# Altium PCB TAUV-Interfacer.PcbDoc (part 1 of 2)
Units mil, origin at the board's own origin, x right, y up, seen from the top; angles counter-clockwise.
Board outline 4460 x 2770 mil, 4 copper layers (Component Side, Ground Plane, Power Plane, Solder Side), stack 33.234 mil thick; 196 components, 135 nets, 730 pads, 0 vias.
Unrouted connection lines stored in the file: 437.
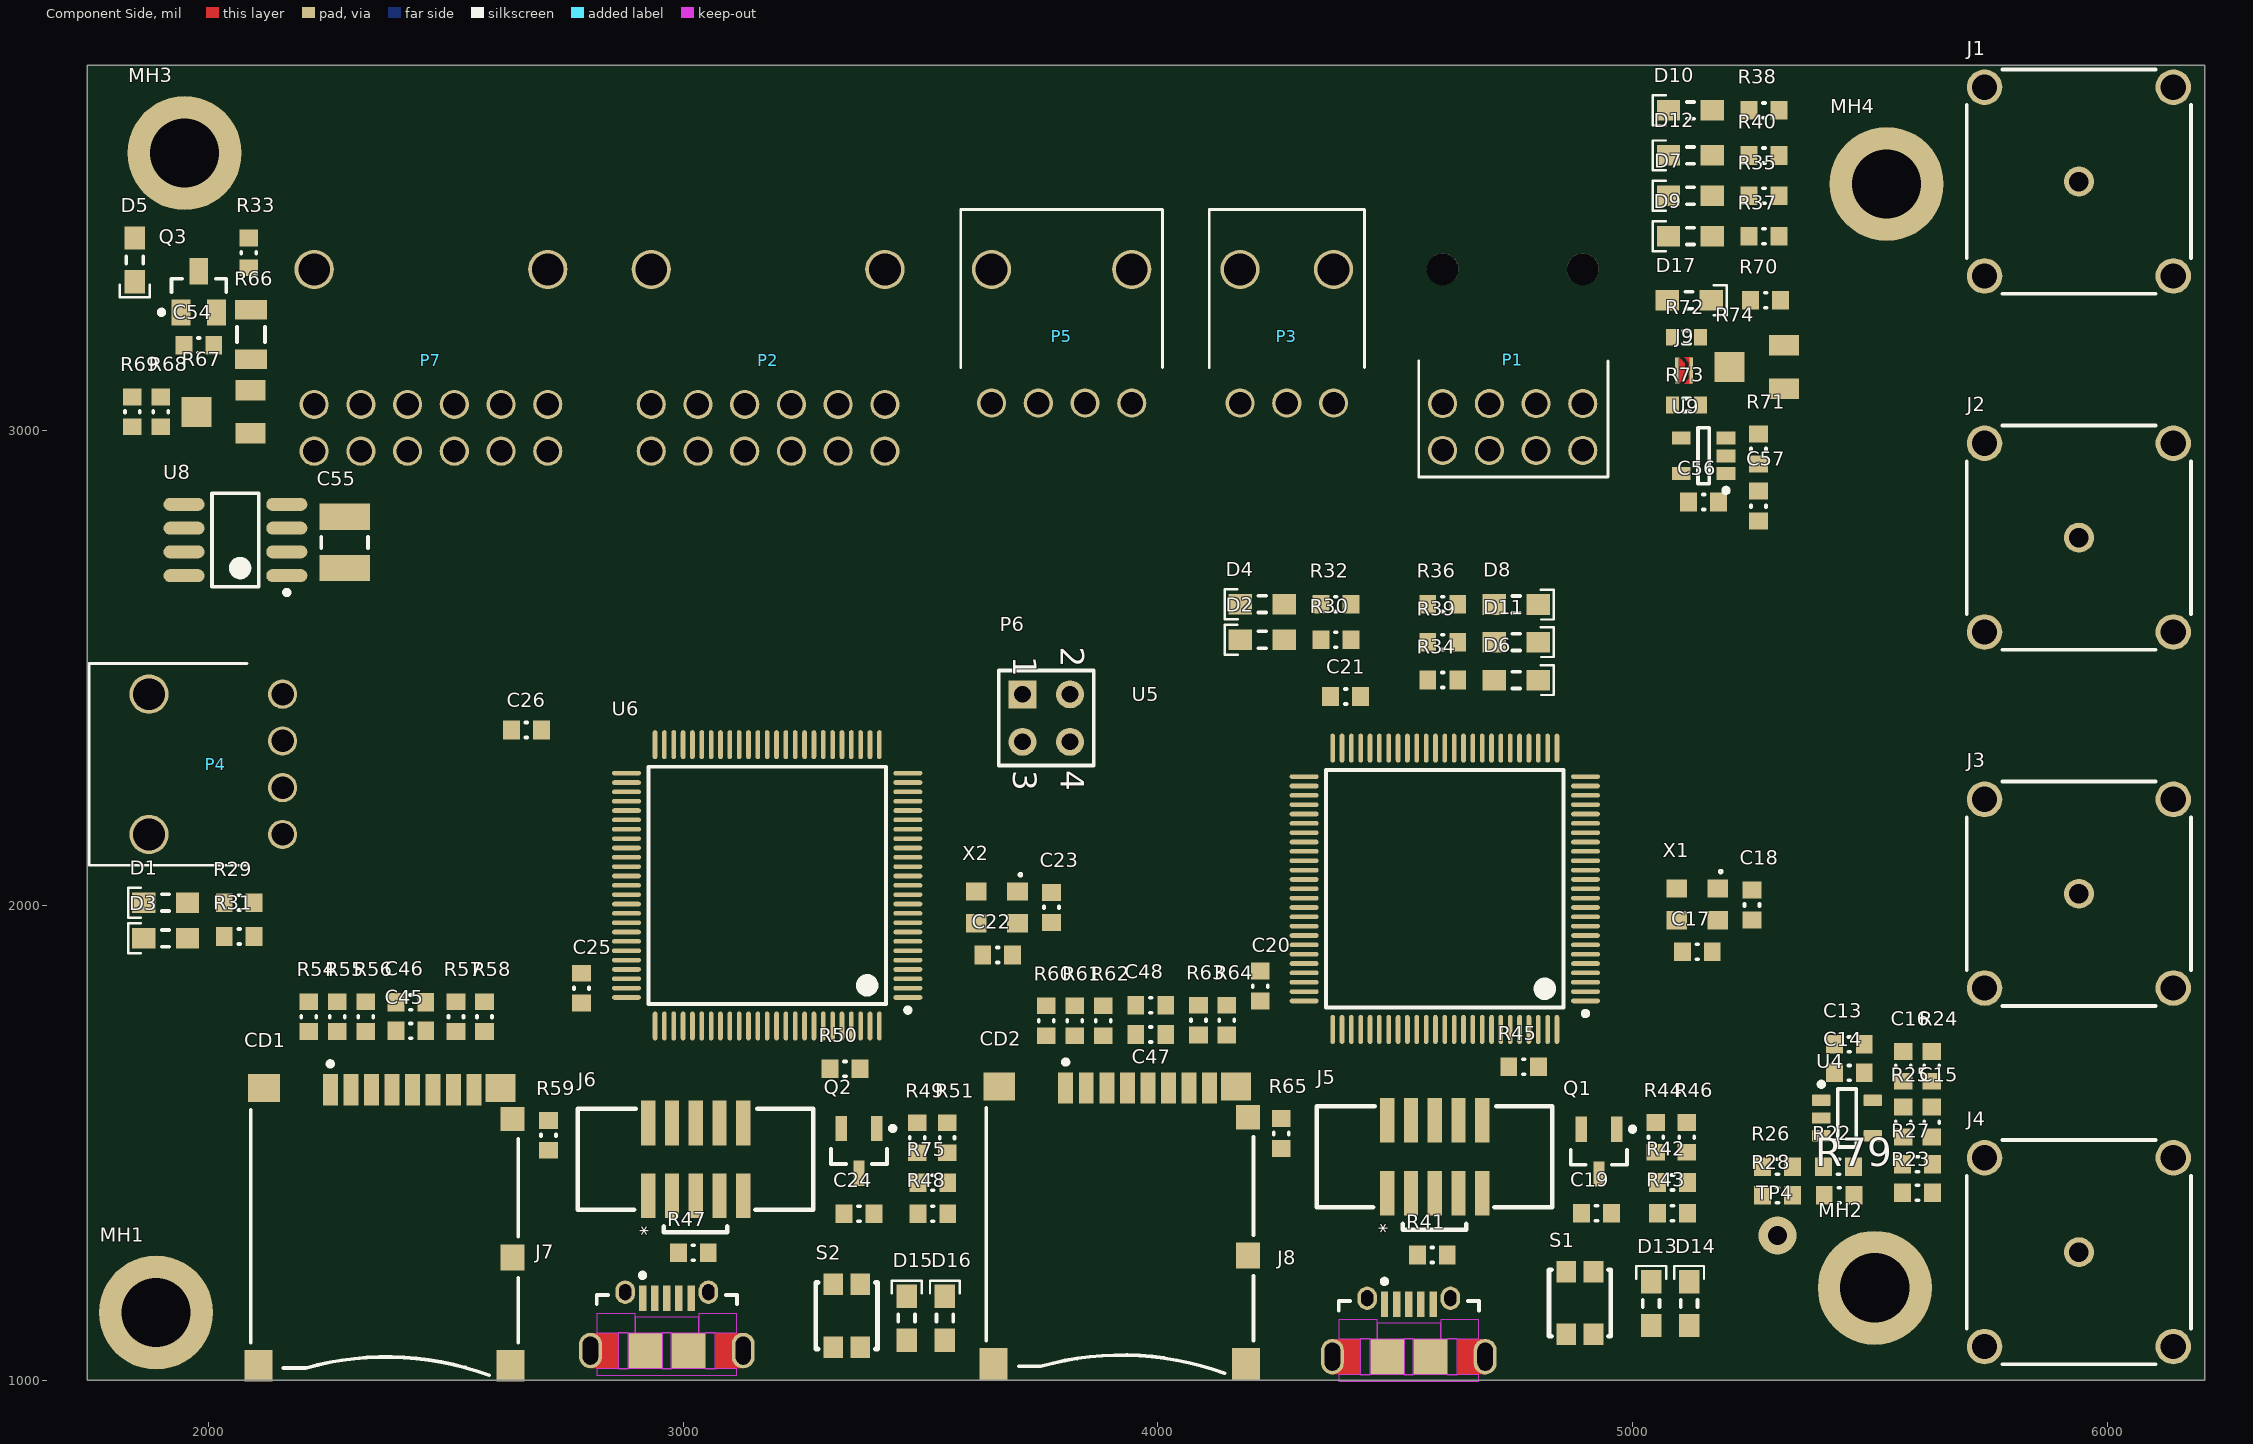
[diagram p0: Component Side view]
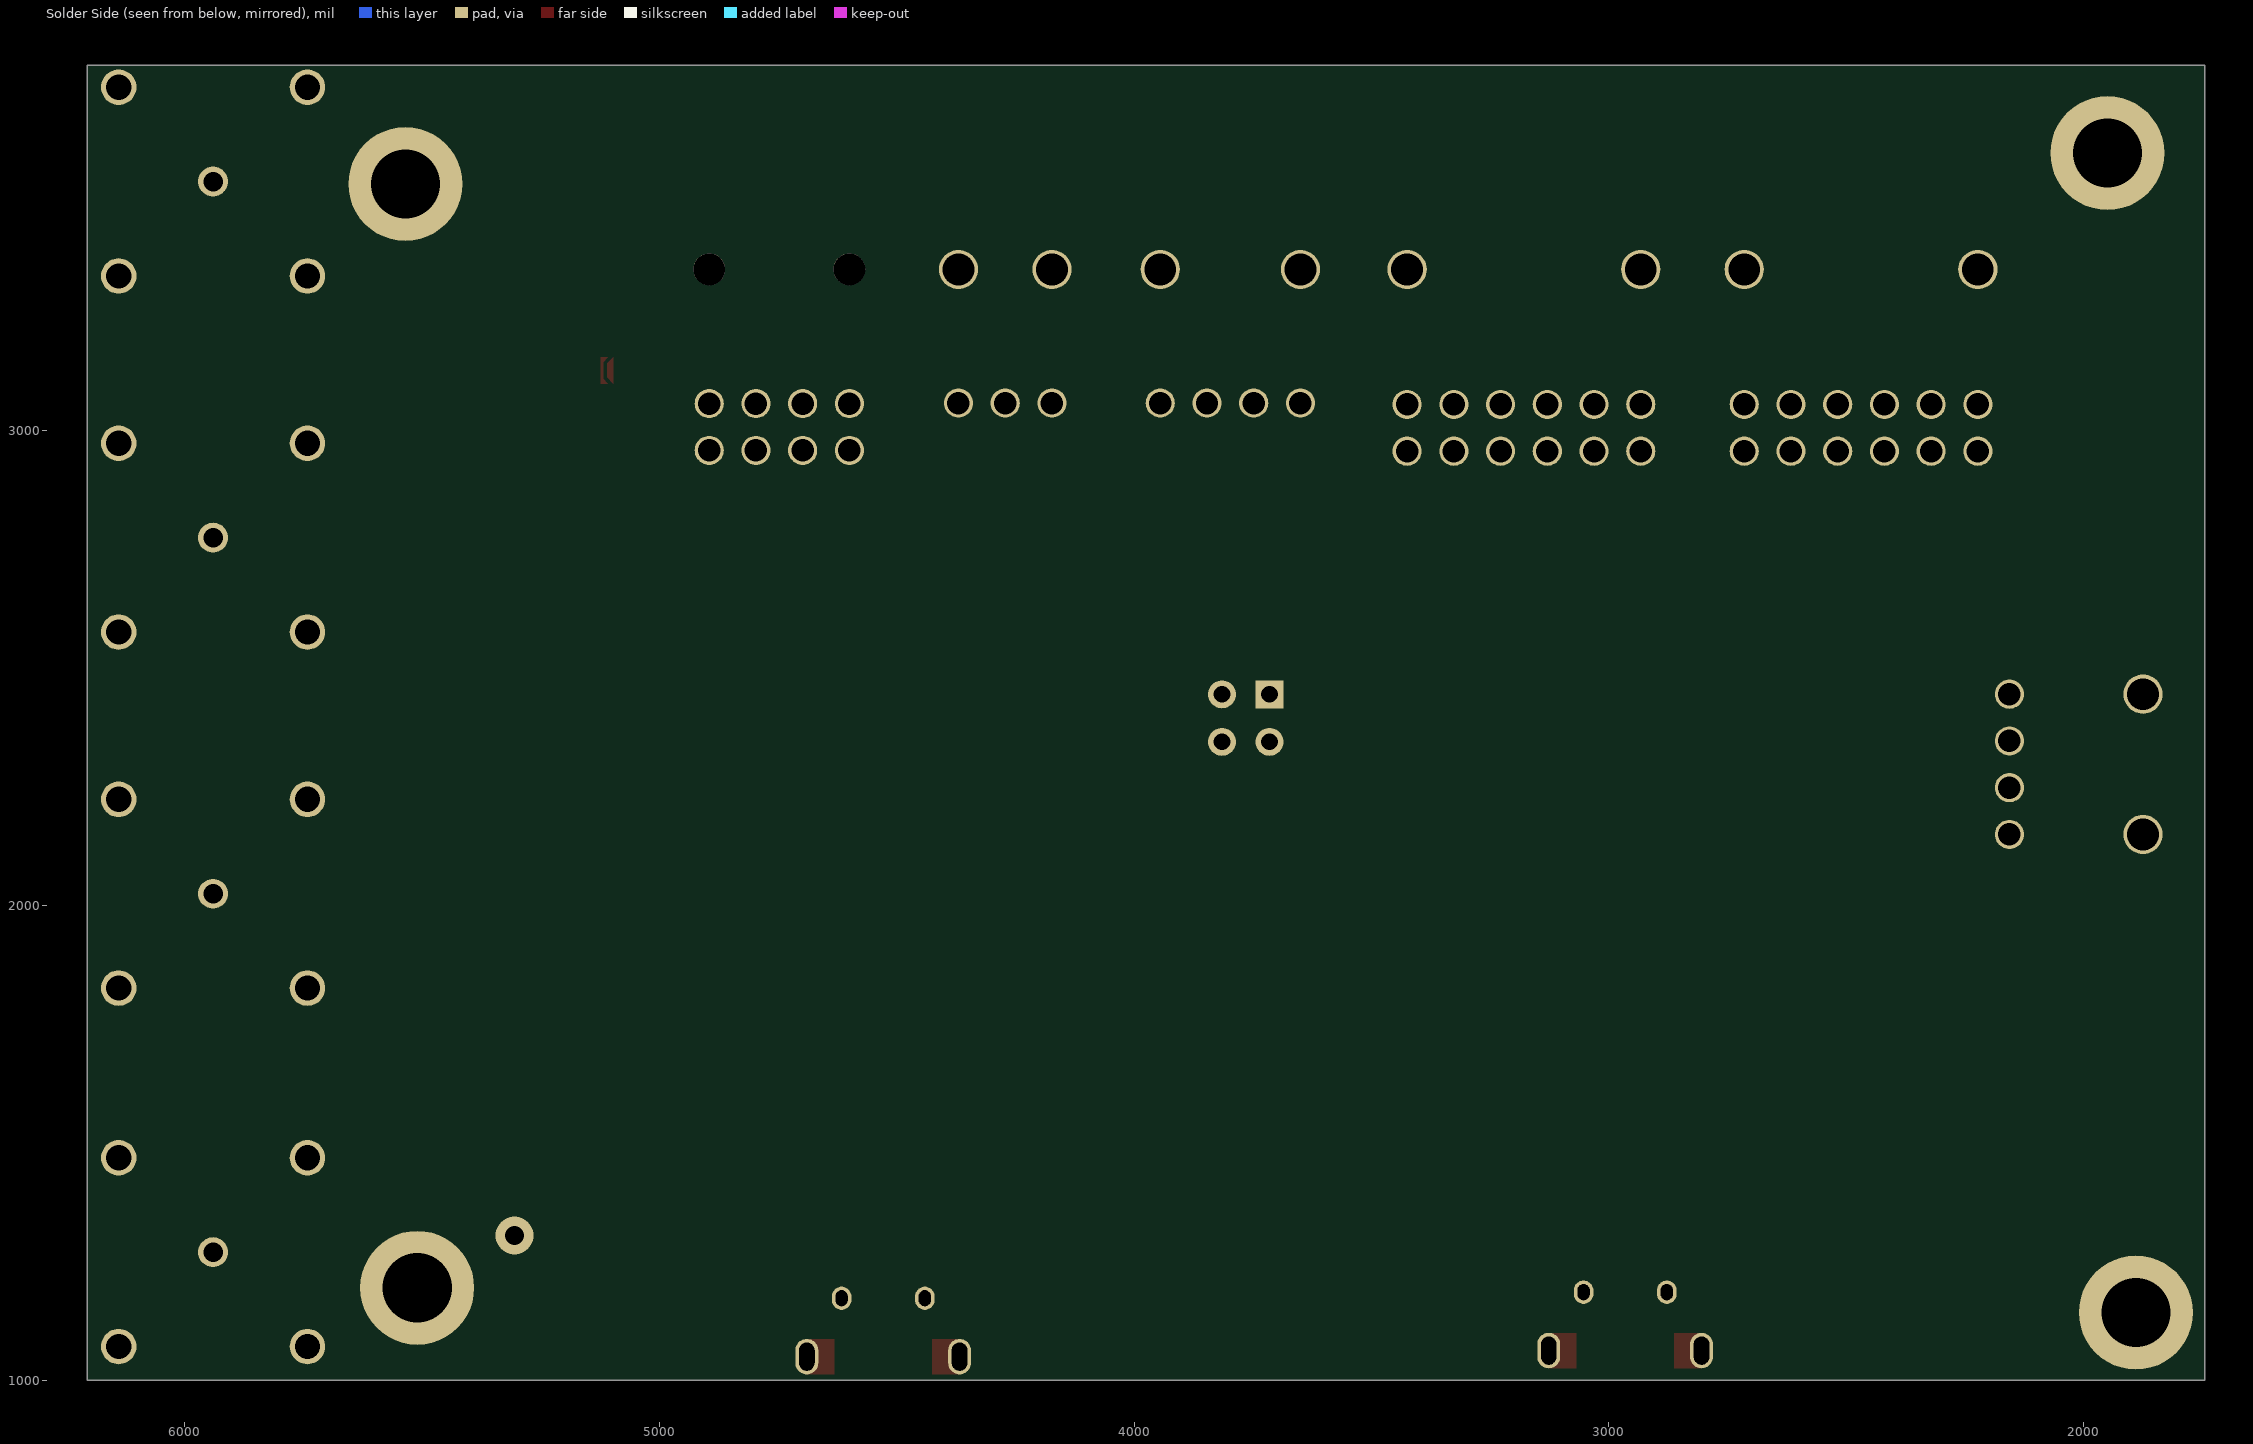
[diagram p1: Solder Side view, seen from below]
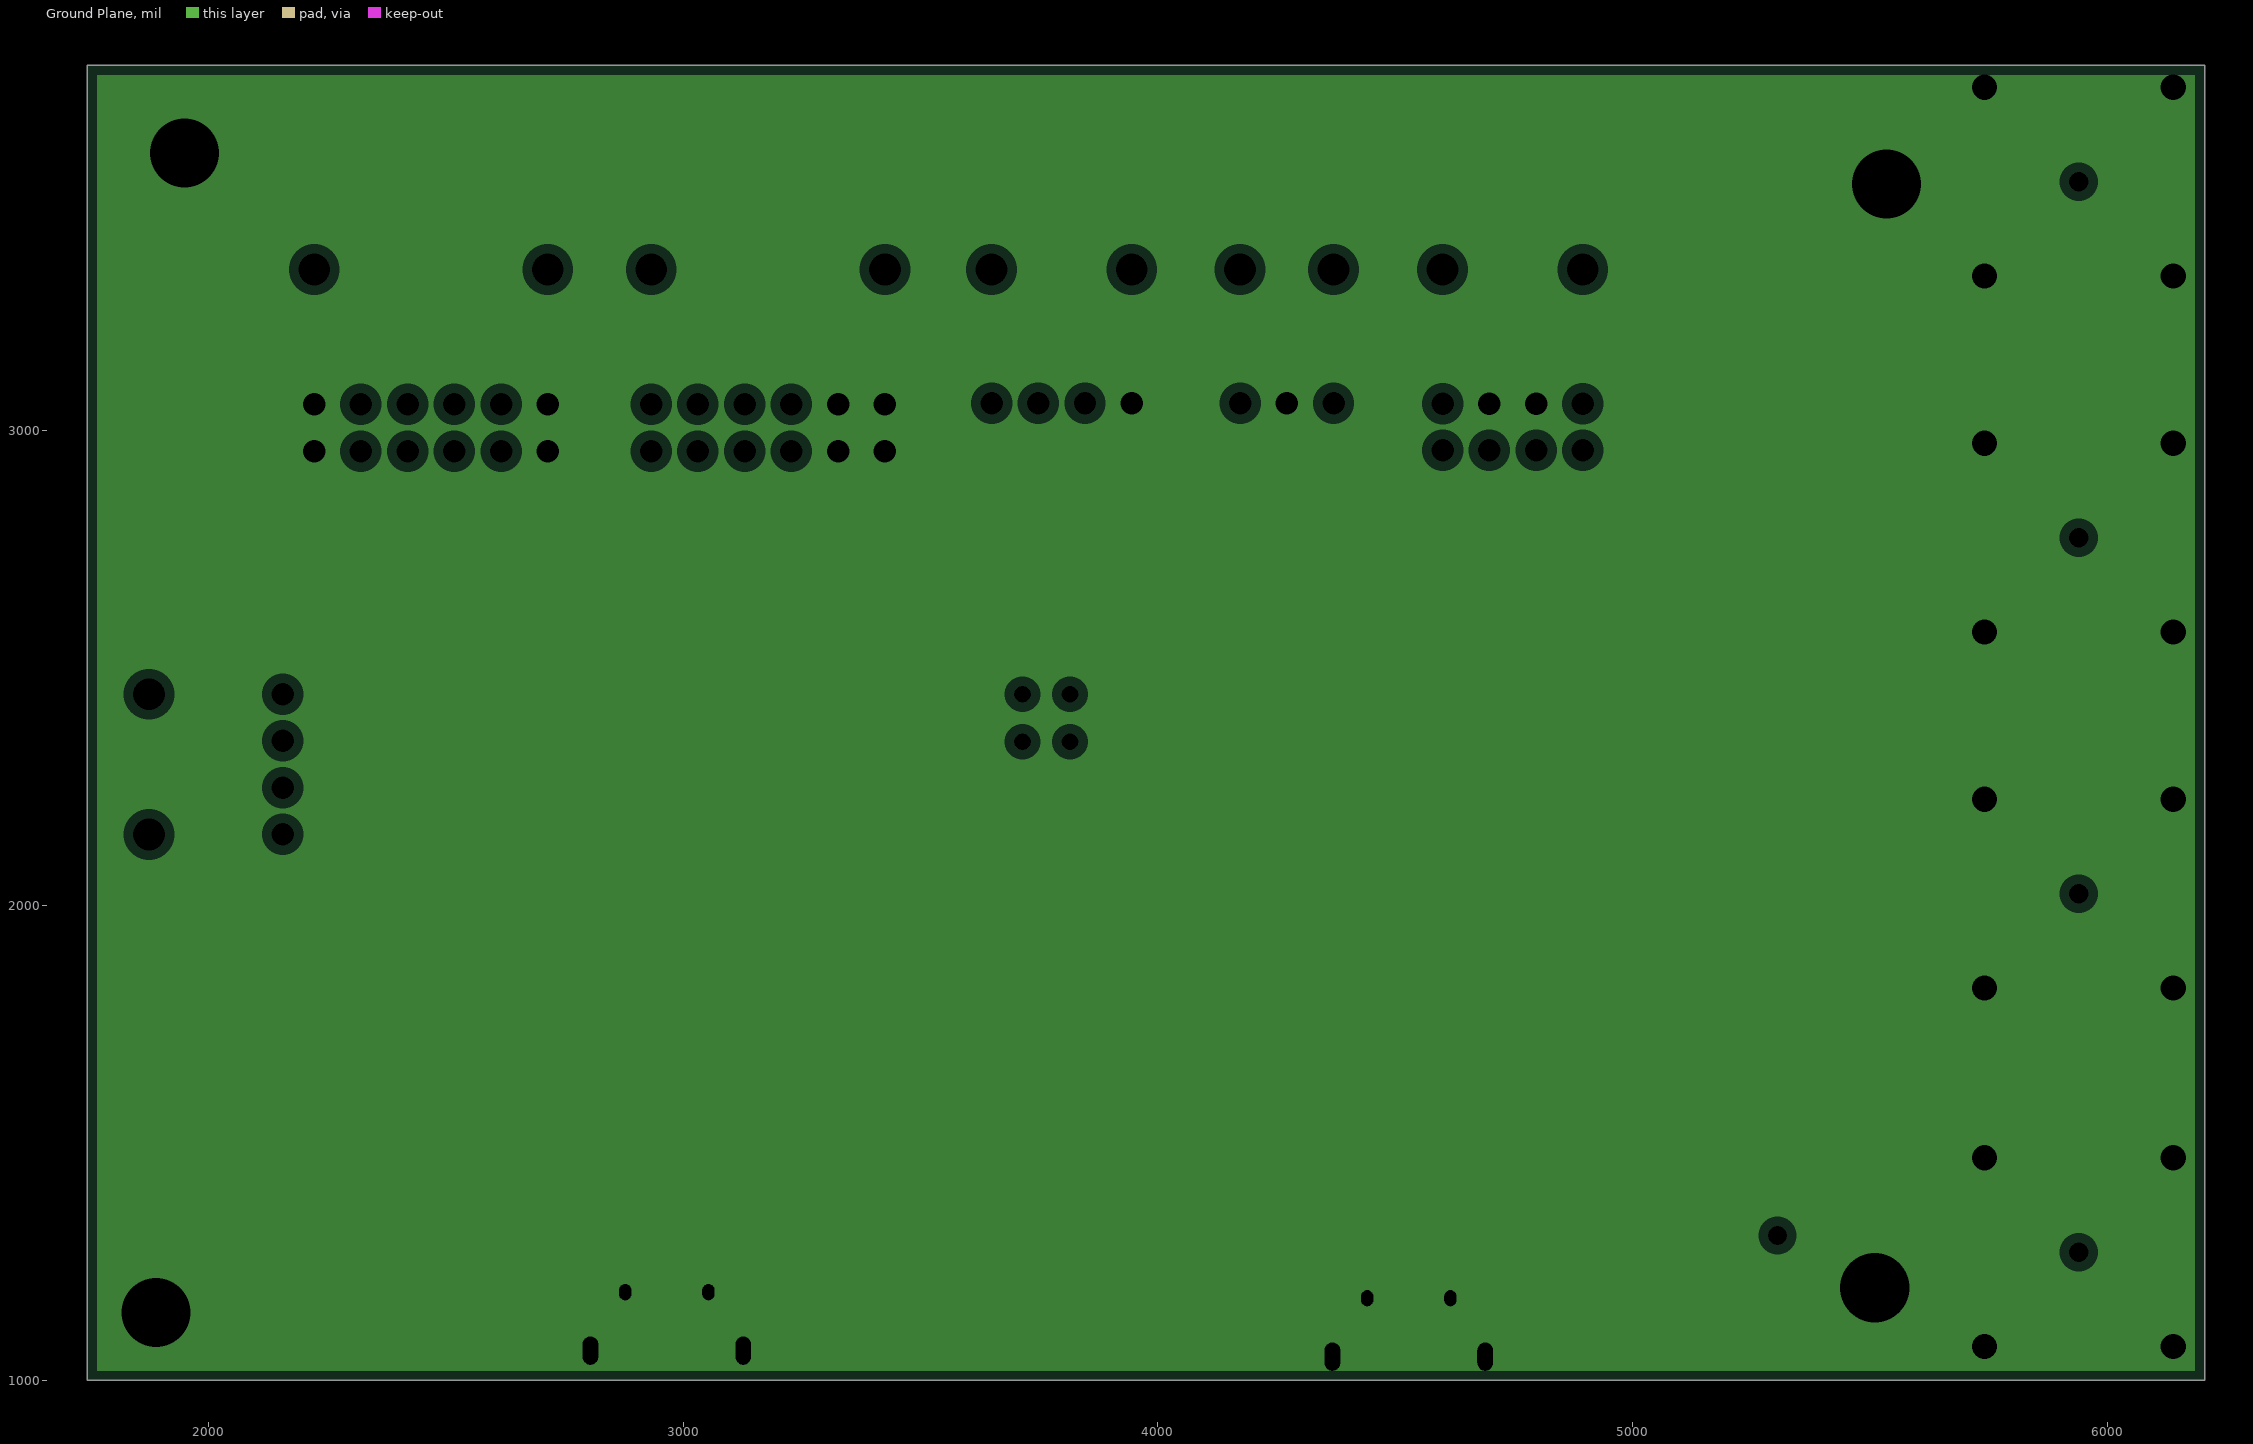
[diagram p2: Ground Plane, clearances drawn from the general rule]
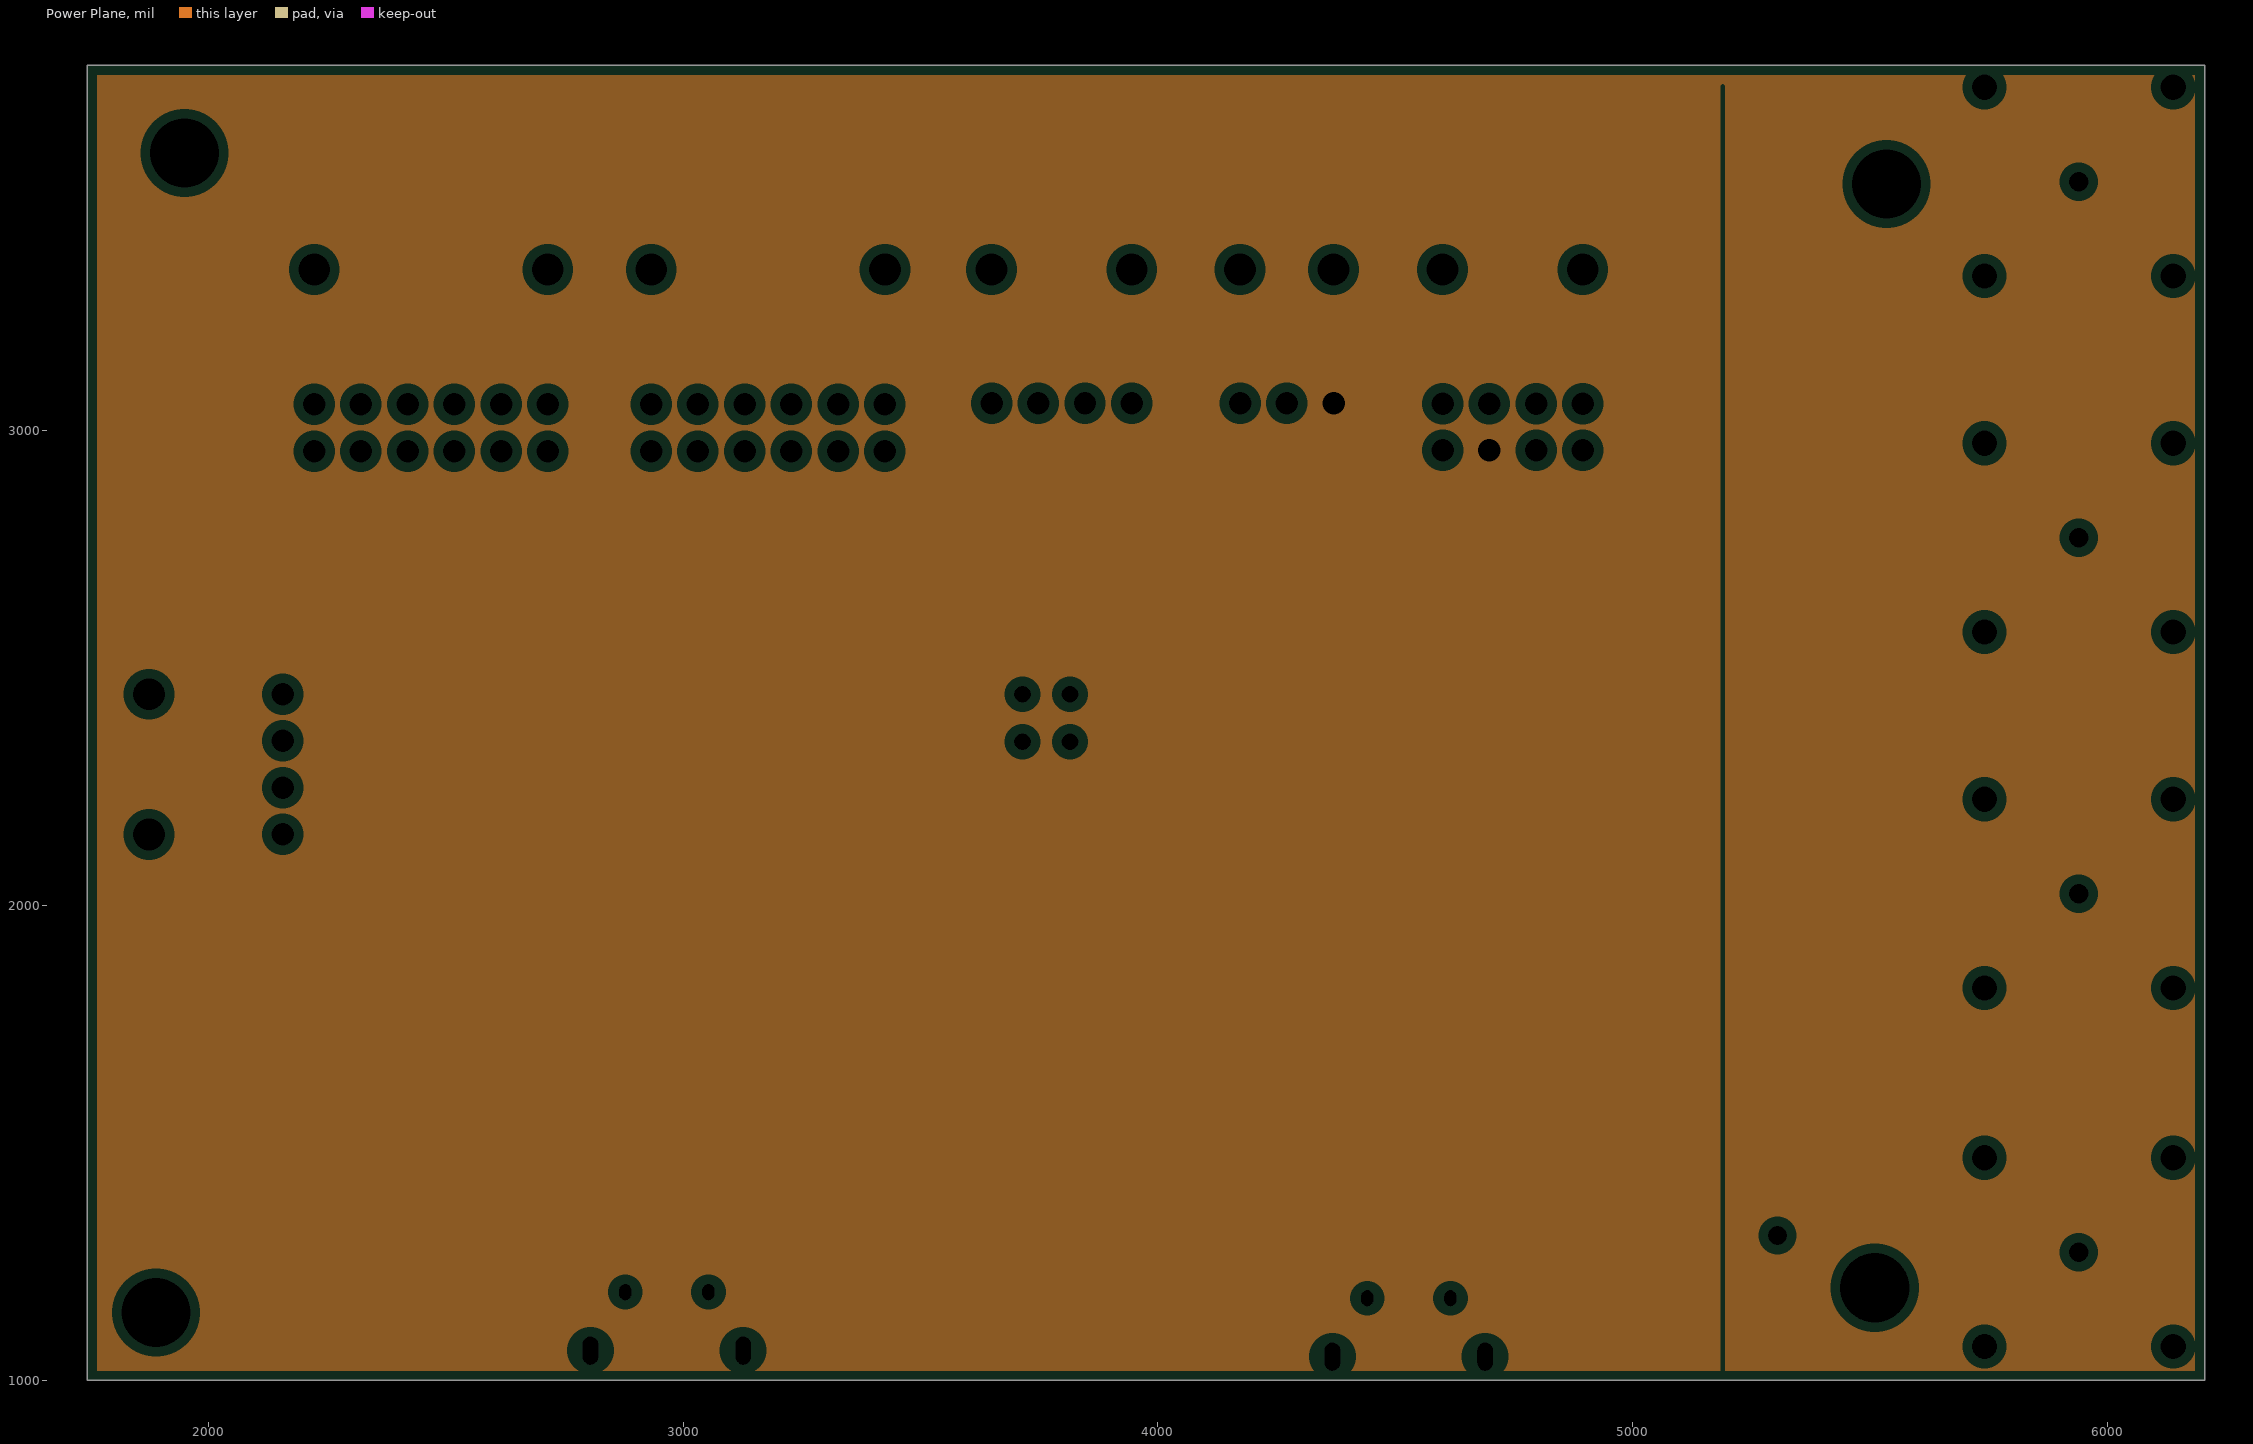
[diagram p3: Power Plane, clearances drawn from the general rule]

## Layer stack, top to bottom
Top Solder: solder mask 0.4, Solder Resist, Dk 3.5
Component Side: signal copper 1.4
Dielectric 1: core 12.6, FR-4, Dk 4.8
Ground Plane: plane copper 1.417, net GND
Dielectric 3: prepreg 5, Dk 4.2
Power Plane: plane copper 1.417, net VCC_3V3
Dielectric 4: core 10, Dk 4.2
Solder Side: signal copper 1.4
Bottom Solder: solder mask 0.4, Solder Resist, Dk 3.5

## Board outline
1745,1000 6205,1000 6205,3770 1745,3770

## Design rules (kind name [scope] priority, off if disabled: settings)
Clearance [All] p1: gap=8 ignorepadtopadclearanceinfootprint=FALSE
PlaneClearance [All] p1: clearance=20
PlaneConnect [All] p1: planeconnectstyle=Relief reliefexpansion=20 reliefentries=4 reliefconductorwidth=10 reliefairgap=10
PolygonConnect [All] p1: connectstyle=Relief reliefconductorwidth=10 reliefentries=4 polygonreliefangle="90 Angle" airgapwidth=10
RoomDefinition U_Power [InComponentClass('U_Power')] p1: confinementstyle=ConfineIn formatcopy=TRUE lockcomponents=FALSE outline 7720,5236.5 9300,5236.5 9300,5566.5 7720,5566.5
RoomDefinition U_MCU_Powers [InComponentClass('U_MCU_Powers')] p2: confinementstyle=ConfineIn formatcopy=TRUE lockcomponents=FALSE outline 7045,5770 11570,5770 11570,6010 7045,6010
RoutingVias [All] p1: holewidth=28 width=50 viastyle="Through Hole" minholewidth=28 minwidth=50 maxholewidth=28 maxwidth=50
SolderMaskExpansion [All] p1: expansion=4
Width [All] p1: maxlimit=10 minlimit=8 preferedwidth=10 minimp=50.000000 maximp=50.000000 favimp=50.000000
28 further rules are at their usual default settings.

## Classes and differential pairs
net class JTAG: MCU1_NRST MCU1_TCK MCU1_TDI MCU1_TDO MCU1_TMS MCU2_NRST MCU2_TCK MCU2_TDI MCU2_TDO MCU2_TMS
component class U_USB: J7 J8
component class U_Servos: C54 C55 P7 Q3 R66 R67 R68 R69 U8
component class U_SD: C45 C46 C47 C48 CD1 CD2 R54 R55 R56 R57 R58 R59 R60 R61 R62 R63 R64 R65
component class U_Power: C49 C50 C51 C52 C53 FB1 U7
component class U_MCU_Powers: C27 C28 C29 C30 C31 C32 C33 C34 C35 C36 C37 C38 C39 C40 C41 C42 C43 C44 R52 R53
component class U_MCU_Main: C22 C23 C24 C25 C26 D15 D16 J6 P6 Q2 R47 R48 R49 R50 R51 R75 S2 U6 X2
component class U_MCU_Hydro: C17 C18 C19 C20 C21 D13 D14 J5 Q1 R41 R42 R43 R44 R45 R46 S1 U5 X1
component class U_Interface: D1 D2 D3 D4 D5 D6 D7 D8 D9 D10 D11 D12 MH1 MH2 MH3 MH4 P1 P2 P3 P4 P5 R29 R30 R31 R32 R33 R34 R35 R36 R37 R38 R39 R40
component class U_Hydrophones: C1 C2 C3 C4 C5 C6 C7 C8 C9 C10 C11 C12 C13 C14 C15 C16 J1 J2 J3 J4 R1 R2 R3 R4 R5 R6 R7 R8 R9 R10 R11 R12 R13 R14 R15 R16 R17 R18 R19 R20 R21 R22 R23 R24 R25 R26 R27 R28 R76 R77 R78 R79 TP1 TP2 TP3 TP4 U1 U2 U3 U4
component class U_Hall_Effect: C56 C57 D17 J9 R70 R71 R72 R73 R74 U9

## Components (designator, comment, footprint, x,y, rotation, side; value= is the part's Value field where it differs from the comment)
C1 "1uF" CAPC0603(1608)100_N 19250,2485 r0 top
C2 "100nF" CAPC0603(1608)100_N 19420,2485 r0 top
C3 "10nF" CAPC0603(1608)100_N 18905,2485 r0 top
C4 "10nF" CAPC0603(1608)100_N 17275,2485 r0 top
C5 "1uF" CAPC0603(1608)100_N 16405,2485 r0 top
C6 "100nF" CAPC0603(1608)100_N 16575,2485 r0 top
C7 "10nF" CAPC0603(1608)100_N 16065,2485 r0 top
C8 "10nF" CAPC0603(1608)100_N 14270,2485 r0 top
C9 "1uF" CAPC0603(1608)100_N 13250,2485 r0 top
C10 "100nF" CAPC0603(1608)100_N 13390,2455 r90 top
C11 "10nF" CAPC0603(1608)100_N 12830,2485 r0 top
C12 "10nF" CAPC0603(1608)100_N 10925,2455 r90 top
C13 "1uF" CAPC0603(1608)100_N 5456.5,1707.72 r0 top
C14 "100nF" CAPC0603(1608)100_N 5456.5,1647.72 r180 top
C15 "10nF" CAPC0603(1608)100_N 5630,1543.98 r270 top
C16 "10nF" CAPC0603(1608)100_N 5570,1661.5 r270 top
C17 "10pF" CAPC0603(1608)100_N 5136.22,1902.66 r180 top
C18 "10pF" CAPC0603(1608)100_N 5251.22,2001.16 r90 top
C19 "100nF" CAPC0603(1608)100_N 4923.94,1351.85 r0 top
C20 "CAP 2.2uF" CAPC0603(1608)100_N 4215.43,1830.49 r90 top value=2.2uF
C21 "CAP 2.2uF" CAPC0603(1608)100_N 4395.43,2440.49 r0 top value=2.2uF
C22 "10pF" CAPC0603(1608)100_N 3662.56,1896.12 r180 top
C23 "10pF" CAPC0603(1608)100_N 3776.06,1996.12 r90 top
C24 "100nF" CAPC0603(1608)100_N 3370.55,1351.12 r0 top
C25 "CAP 2.2uF" CAPC0603(1608)100_N 2786.06,1826.16 r90 top value=2.2uF
C26 "CAP 2.2uF" CAPC0603(1608)100_N 2670,2370 r0 top value=2.2uF
C27 "100nF" CAPC0603(1608)100_N 8905,5840 r90 top
C28 "100nF" CAPC0603(1608)100_N 9135,5840 r90 top
C29 "100nF" CAPC0603(1608)100_N 9365,5840 r90 top
C30 "100nF" CAPC0603(1608)100_N 9595,5840 r90 top
C31 "100nF" CAPC0603(1608)100_N 9855,5870 r0 top
C32 "100nF" CAPC0603(1608)100_N 10035,5840 r90 top
C33 "100nF" CAPC0603(1608)100_N 10265,5840 r90 top
C34 "100nF" CAPC0603(1608)100_N 10495,5840 r90 top
C35 "100nF" CAPC0603(1608)100_N 10725,5840 r90 top
C36 "100nF" CAPC0603(1608)100_N 10955,5840 r90 top
C37 "100nF" CAPC0603(1608)100_N 11185,5840 r90 top
C38 "100nF" CAPC0603(1608)100_N 11415,5840 r90 top
C39 "10uF" CAPC0603(1608)100_N 7545,5840 r90 top
C40 "100nF" CAPC0603(1608)100_N 7775,5840 r90 top
C41 "1uF" CAPC0603(1608)100_N 8035,5870 r0 top
C42 "10uF" CAPC0603(1608)100_N 8215,5840 r90 top
C43 "100nF" CAPC0603(1608)100_N 8445,5840 r90 top
C44 "1uF" CAPC0603(1608)100_N 8675,5840 r90 top
C45 "100nF" CAPC0603(1608)100_N 2426.58,1736.12 r180 top
C46 "10uF" CAPC0603(1608)100_N 2426.58,1796.12 r180 top
C47 "100nF" CAPC0603(1608)100_N 3985,1728.5 r180 top
C48 "10uF" CAPC0603(1608)100_N 3985,1790 r180 top
C49 "100nF" CAPC0603(1608)100_N 7995,5396.5 r90 top
C50 "1uF" CAPC0603(1608)100_N 8225,5396.5 r90 top
C51 "100nF" CAPC0603(1608)100_N 8485,5426.5 r0 top
C52 "1uF" CAPC0603(1608)100_N 8665,5396.5 r90 top
C53 "22uF" CAPC1210(3225)100_N 7820,5396.5 r0 top
C54 "10nF" CAPC0603(1608)100_N 1980,3180 r0 top
C55 "CAP 22uF 25V 1210(3225)" CAPC1210(3225)220_N 2287.07,2765 r270 top value=22uF
C56 "100nF" CAPC0603(1608)100_N 5149.37,2850 r0 top
C57 "1uF" CAPC0603(1608)100_N 5265,2841.5 r90 top
CD1 "502774-0891" MOLX-502774-0891_V 2371.06,1321.12 r0 top
CD2 "502774-0891" MOLX-502774-0891_V 3920,1325 r0 top
D1 "LED BLUE" LED_0805 1910,2006.24 r0 top
D2 "LED BLUE" LED_0805 4220,2560 r0 top
D3 "LED GREEN" LED_0805 1910,1931.12 r0 top
D4 "LED GREEN" LED_0805 4220,2635 r0 top
D5 "LED GREEN" LED_0805 1845,3360 r90 top
D6 "LED YELLOW" LED_0805 4755,2475 r180 top
D7 "LED GREEN" LED_0805 5121.7,3495.18 r0 top
D8 "LED YELLOW" LED_0805 4755,2634.15 r180 top
D9 "LED GREEN" LED_0805 5121.7,3410 r0 top
D10 "LED GREEN" LED_0805 5121.7,3675 r0 top
D11 "LED GREEN" LED_0805 4755,2555 r180 top
D12 "LED GREEN" LED_0805 5121.7,3580 r0 top
D13 "LED RED" LED_0805 5038.94,1161.85 r270 top
D14 "LED RED" LED_0805 5118.94,1161.85 r270 top
D15 "LED RED" LED_0805 3470.98,1131.12 r270 top
D16 "LED RED" LED_0805 3551.5,1131.12 r270 top
D17 "LED RED" LED_0805 5118.94,3275 r180 top
FB1 "BLM31PG601SN1L" MURA-BLM31-B-CHIP-2_V 9170,5351.5 r90 top
J1 "51K201-400A5" ROS-51K201-400A5_V 5940,3525 r270 top
J2 "51K201-400A5" ROS-51K201-400A5_V 5940,2775 r270 top
J3 "51K201-400A5" ROS-51K201-400A5_V 5940,2025 r270 top
J4 "51K201-400A5" ROS-51K201-400A5_V 5940,1270 r270 top
J5 "JTAG 10POS 1.27" "5x2 JTAG SMD" 4834.8,1301.73 r90 top
J6 "JTAG 10POS 1.27" "5x2 JTAG SMD" 3278.23,1296.32 r90 top
J7 "ZX62D-AB-5P8" HIRO-ZX62D-AB-5P8_V 2965.73,1124.29 r0 top
J8 "ZX62D-AB-5P8" HIRO-ZX62D-AB-5P8_V 4528.5,1111.52 r0 top
J9 "(Closed)" "Solder Jumper - Closed" 5123.38,3127.13 r180 top
MH1 "#4-40" "Mounting Hole #4-40" 1890,1142.78 r0 top
MH2 "#4-40" "Mounting Hole #4-40" 5510,1195 r0 top
MH3 "#4-40" "Mounting Hole #4-40" 1950,3585 r0 top
MH4 "#4-40" "Mounting Hole #4-40" 5535,3520 r0 top
P1 "8-Pin 4x2 Molex Nano-Fit" "MOLEX NANO-FIT 2x4" 4599.72,2958.9 r0 top
P2 "12-Pin Molex Nano-Fit" "MOLEX NANO-FIT 2X6 - Right Angle" 3523.43,3055.55 r180 top
P3 "3-Pin Molex Nano-Fit" "MOLEX NANO-FIT 1X3" 4370,3058.5 r180 top
P4 "4-Pin Molex Nano-Fit" "MOLEX NANO-FIT 1X4" 2156.5,2445.28 r270 top
P5 "4-Pin Molex Nano-Fit" "MOLEX NANO-FIT 1X4" 3945,3058.5 r180 top
P6 "Header 2X2" HDR2X2 3715,2445 r270 top
P7 "12-Pin Molex Nano-Fit" "MOLEX NANO-FIT 2X6 - Right Angle" 2813.43,3055.55 r180 top
Q1 "2N7002" INF-PG-SOT23_M 4928.94,1481.85 r270 top
Q2 "2N7002" INF-PG-SOT23_M 3370.55,1483.37 r270 top
Q3 "FDN337N" FAIR-SSOT3L-3_V 1980,3292.89 r90 top
R1 "2K" RESC0603(1608)_N 19590,2485 r0 top value="2000.00 Ohm"
R2 "3K24 1%" RESC0603(1608)_N 19075,2485 r0 top value="3240.00 Ohm"
R3 "270R" RESC0603(1608)_N 18015,2475 r0 top value="270.00 Ohm"
R4 "10K" RESC0603(1608)_N 18205,2485 r0 top value="10000.00 Ohm"
R5 "10K" RESC0603(1608)_N 17615,2485 r0 top value="10000.00 Ohm"
R6 "3K24 1%" RESC0603(1608)_N 17445,2485 r0 top value="3240.00 Ohm"
R7 "10K" RESC0603(1608)_N 16915,2485 r0 top value="10000.00 Ohm"
R8 "2K" RESC0603(1608)_N 16745,2485 r0 top value="2000.00 Ohm"
R9 "3K24 1%" RESC0603(1608)_N 16235,2485 r0 top value="3240.00 Ohm"
R10 "270R" RESC0603(1608)_N 15125,2475 r0 top value="270.00 Ohm"
R11 "10K" RESC0603(1608)_N 15330,2485 r0 top value="10000.00 Ohm"
R12 "10K" RESC0603(1608)_N 14630,2455 r90 top value="10000.00 Ohm"
R13 "3K24 1%" RESC0603(1608)_N 14410,2455 r90 top value="3240.00 Ohm"
R14 "10K" RESC0603(1608)_N 13830,2455 r90 top value="10000.00 Ohm"
R15 "2K" RESC0603(1608)_N 13610,2455 r90 top value="2000.00 Ohm"
R16 "3K24 1%" RESC0603(1608)_N 13000,2455 r90 top value="3240.00 Ohm"
R17 "270R" RESC0603(1608)_N 11875,2475 r0 top value="270.00 Ohm"
R18 "10K" RESC0603(1608)_N 12045,2455 r90 top value="10000.00 Ohm"
R19 "10K" RESC0603(1608)_N 11375,2455 r90 top value="10000.00 Ohm"
R20 "3K24 1%" RESC0603(1608)_N 11145,2455 r90 top value="3240.00 Ohm"
R21 "10K" RESC0603(1608)_N 10555,2485 r0 top value="10000.00 Ohm"
R22 "2K" RESC0603(1608)_N 5433.5,1450 r180 top value="2000.00 Ohm"
R23 "3K24 1%" RESC0603(1608)_N 5600,1395 r0 top value="3240.00 Ohm"
R24 "270R" RESC0603(1608)_N 5630,1661.5 r270 top value="270.00 Ohm"
R25 "10K" RESC0603(1608)_N 5570,1543.98 r90 top value="10000.00 Ohm"
R26 "10K" RESC0603(1608)_N 5305,1450 r0 top value="10000.00 Ohm"
R27 "3K24 1%" RESC0603(1608)_N 5600,1455 r180 top value="3240.00 Ohm"
R28 "10K" RESC0603(1608)_N 5305,1390 r0 top value="10000.00 Ohm"
R29 "130R" RESC0603(1608)_N 2065,2006.24 r180 top value="130.00 Ohm"
R30 "130R" RESC0603(1608)_N 4375,2560 r180 top value="130.00 Ohm"
R31 "100R" RESC0603(1608)_N 2065,1935 r180 top value="100.00 Ohm"
R32 "100R" RESC0603(1608)_N 4375,2635 r180 top value="100.00 Ohm"
R33 "220R" RESC0603(1608)_N 2085,3375 r270 top value="220.00 Ohm"
R34 "100R" RESC0603(1608)_N 4600,2475 r0 top value="100.00 Ohm"
R35 "220R" RESC0603(1608)_N 5276.7,3495 r0 top value="220.00 Ohm"
R36 "100R" RESC0603(1608)_N 4600,2635 r0 top value="100.00 Ohm"
R37 "100R" RESC0603(1608)_N 5276.7,3410 r0 top value="100.00 Ohm"
R38 "1K2" RESC0603(1608)_N 5276.7,3675 r0 top value="1200.00 Ohm"
R39 "100R" RESC0603(1608)_N 4600,2555 r0 top value="100.00 Ohm"
R40 "470R" RESC0603(1608)_N 5276.7,3580 r0 top value="470.00 Ohm"
R41 "10K" RESC0603(1608)_N 4578.15,1263.94 r0 top value="10000.00 Ohm"
R42 "10K" RESC0603(1608)_N 5083.94,1416.85 r0 top value="10000.00 Ohm"
R43 "100R" RESC0603(1608)_N 5083.94,1351.85 r180 top value="100.00 Ohm"
R44 "10K" RESC0603(1608)_N 5048.94,1511.85 r270 top value="10000.00 Ohm"
R45 "10K" RESC0603(1608)_N 4770.43,1660.49 r0 top value="10000.00 Ohm"
R46 "100R" RESC0603(1608)_N 5113.94,1511.85 r90 top value="100.00 Ohm"
R47 "10K" RESC0603(1608)_N 3021.65,1268.84 r0 top value="10000.00 Ohm"
R48 "100R" RESC0603(1608)_N 3526.06,1351.12 r180 top value="100.00 Ohm"
R49 "10K" RESC0603(1608)_N 3493.35,1511.12 r270 top value="10000.00 Ohm"
R50 "10K" RESC0603(1608)_N 3341.06,1656.12 r0 top value="10000.00 Ohm"
R51 "100R" RESC0603(1608)_N 3556.06,1511.12 r90 top value="100.00 Ohm"
R52 "47R" RESC0603(1608)_N 7130,5860 r0 top value="47.00 Ohm"
R53 "47R" RESC0603(1608)_N 7360,5860 r0 top value="47.00 Ohm"
R54 "47K" RESC0603(1608)_N 2211.58,1766.12 r90 top value="47000.00 Ohm"
R55 "47K" RESC0603(1608)_N 2271.58,1766.12 r90 top value="47000.00 Ohm"
R56 "47K" RESC0603(1608)_N 2331.58,1766.12 r90 top value="47000.00 Ohm"
R57 "47K" RESC0603(1608)_N 2521.58,1766.12 r90 top value="47000.00 Ohm"
R58 "47K" RESC0603(1608)_N 2581.58,1766.12 r90 top value="47000.00 Ohm"
R59 "10K" RESC0603(1608)_N 2716.58,1516.12 r270 top value="10000.00 Ohm"
R60 "47K" RESC0603(1608)_N 3765,1757.44 r90 top value="47000.00 Ohm"
R61 "47K" RESC0603(1608)_N 3825,1757.44 r90 top value="47000.00 Ohm"
R62 "47K" RESC0603(1608)_N 3885,1757.44 r90 top value="47000.00 Ohm"
R63 "47K" RESC0603(1608)_N 4085.67,1758.7 r90 top value="47000.00 Ohm"
R64 "47K" RESC0603(1608)_N 4145,1758.7 r90 top value="47000.00 Ohm"
R65 "10K" RESC0603(1608)_N 4260,1520 r270 top value="10000.00 Ohm"
R66 "MCS1632R050FER" RESC3216X62X50LL20T20 2090,3202.89 r90 top
R67 "22AR100KLFTR" "TT BI 22A TRIM POT" 2089.17,3040 r90 top value=100k
R68 "1K 1% 0603(1608)" RESC0603(1608)_N 1900,3040 r90 top value="1000.00 Ohm"
R69 "330R 1% 0603(1608)" RESC0603(1608)_N 1840,3040 r90 top value="330.00 Ohm"
R70 "100R" RESC0603(1608)_N 5280,3275 r0 top value="100.00 Ohm"
R71 "33K" RESC0603(1608)_N 5265,2961.5 r270 top value="33000.00 Ohm"
R72 "Res3" J1-0603 5113.38,3197.13 r180 top value=DNP
R73 "Res3" J1-0603 5113.38,3054.37 r0 top value=DNP
R74 "22AR100KLFTR" "TT BI 22A TRIM POT" 5318.38,3134.45 r90 top value=100k
R75 "10K" RESC0603(1608)_N 3526.06,1416.12 r0 top value="10000.00 Ohm"
R76 "270R" RESC0603(1608)_N 12075,1845 r90 top value="270.00 Ohm"
R77 "270R" RESC0603(1608)_N 11845,1845 r90 top value="270.00 Ohm"
R78 "270R" RESC0603(1608)_N 11615,1845 r90 top value="270.00 Ohm"
R79 "270R" RESC0603(1608)_N 5435,1390 r0 top value="270.00 Ohm"
S1 "tact switch" EVP-AA202K 4888.94,1163.11 r270 top
S2 "tact switch" EVP-AA202K 3344.49,1136.12 r270 top
TP1 "Test Point Loop" "Test Point Loop - Black" 17775,2465 r0 top
TP2 "Test Point Loop" "Test Point Loop - Black" 14870,2465 r0 top
TP3 "Test Point Loop" "Test Point Loop - Black" 11615,2465 r0 top
TP4 "Test Point Loop" "Test Point Loop - Black" 5305,1305 r0 top
U1 "LMC7101AIM5X" DBV0005A_N 17095,2440 r0 top
U2 "LMC7101AIM5X" DBV0005A_N 14090,2440 r0 top
U3 "LMC7101AIM5X" DBV0005A_N 10775,2440 r0 top
U4 "LMC7101AIM5X" DBV0005A_N 5451.5,1552.72 r0 top
U5 "STM32F746VGT7" STM-LQFP100_L 4604.37,2035.41 r180 top
U6 "STM32F746VGT7" STM-LQFP100_L 3177.13,2042.7 r180 top
U7 "UA78L09ACPK" PK0003A_N 8975,5356.5 r0 top
U8 "MIC5021YM" MICL-SOICN-8LD-PL-1_V 2057.07,2770 r180 top
U9 "TS391SN2T1G" ONSC-TSOP-5-483-02_V 5149.37,2947.34 r180 top
X1 "7M-25.000MEEQ-T" OSCSC320X250X100N 5136.22,2002.66 r270 top
X2 "7M-25.000MEEQ-T" OSCSC320X250X100N 3661.06,1996.12 r270 top

## Footprints (in the part's own frame and the unit in brackets; to place one, negate y for a bottom-side part, rotate by r counter-clockwise, add the part's x,y. Pads: shape width x height; smd on the part's side, far side on the other; paste and mask are expansions set on the pad)
"5x2 JTAG SMD" [mm]
  rect 2.4x0.76 smd: 1(2.35,8.93) 2(6.25,8.93) 3(2.35,7.66) 4(6.25,7.66) 5(2.35,6.39) 6(6.25,6.39) 7(2.35,5.12) 8(6.25,5.12) 9(2.35,3.85) 10(6.25,3.85)
  silkscreen extent 0.4,0.1 7,12.7, body extent 1.55,0.07 7.05,12.72, height 5.6
CAPC0603(1608)100_N [mm] "Chip Capacitor, Body 1.6x0.8mm, Height 1.0mm, IPC Medium Density"
  rect 0.9x1 smd: 1(-0.8,0) 2(0.8,0)
  silkscreen extent -0.05,-0.4 0.05,0.4, body extent -0.87,-0.48 0.88,0.47, height 1
CAPC1210(3225)100_N [mm] "Chip Capacitor, Body 3.2x2.5mm, Height 1mm, IPC Medium Density"
  rect 1.15x2.7 smd: 1(-1.5,0) 2(1.5,0)
  silkscreen extent -0.55,-1.25 0.55,1.25, body extent -1.7,-1.35 1.7,1.35, height 1
CAPC1210(3225)220_N [mm] "Chip Capacitor, Body 3.2x2.5mm, Height 2.2mm, IPC Medium Density"
  rect 1.4x2.7 smd: 1(-1.375,0) 2(1.375,0)
  silkscreen extent -0.3,-1.25 0.3,1.25, body extent -1.7,-1.35 1.7,1.35, height 2.2
DBV0005A_N [mm] "SOT23, 5-Leads, Body 3.05x1.75mm, Pitch 0.95mm, IPC Medium Density"
  rrect17% 1x0.6 smd: 1(-1.375,0.95) 2(-1.375,0) 3(-1.375,-0.95) 4(1.375,-0.95) 5(1.375,0.95)
  silkscreen extent -1.5,-1.55 0.5,1.92, body extent -1.42,-1.46 1.42,1.46, height 1.08
EVP-AA202K [mm] "Momentary Switch SMT SPST-NO EVP-AA series"
  rect 1.15x1.05 smd: 1(-1.675,0.725) 1(1.675,0.725) 2(-1.675,-0.725) 2(1.675,-0.725)
  silkscreen extent -1.78,-1.65 1.78,1.65, body extent -2.16,-1.55 2.14,1.56, height 1.7
FAIR-SSOT3L-3_V [mm] "SOT23, 3-Leads, Body 2.92x1.4mm, Pitch 0.95mm"
  rect 1.4x1 smd: 1(-1.1,0.95) 2(-1.1,-0.95) 3(1.1,0)
  silkscreen extent -1.22,-1.46 0.7,2.12, body extent -1.26,-1.46 1.26,1.46, height 1.12
HDR2X2 [mm] "Connector; Header; 2x2 Position"
  rect 1.5x1.5 hole 0.9: 1(0,0)
  round 1.5 hole 0.9: 2(0,2.54) 3(2.54,0) 4(2.54,2.54)
  silkscreen extent -1.27,-1.27 3.81,3.81
HIRO-ZX62D-AB-5P8_V [mm] "USB Micro-AB Connector, 5-Leads, Pitch 0.65mm"
  rect 0.4x1.35 smd: 1(-1.3,1.238) 2(-0.65,1.238) 3(0,1.238) 4(0.65,1.238) 5(1.3,1.238)
  oval 1.05x1.25 hole 0.65 slot 0.85 at 90 deg: 6(2.225,1.563) 11(-2.225,1.563)
  oval 1.225x1.9 hole 0.825 slot 1.5 at 90 deg: 7(4.088,-1.562) 10(-4.088,-1.562)
  rect 1.8x1.9 smd: 8(1.15,-1.562) 9(-1.15,-1.562)
  Component Side region: -4.088,-2.513 -2.6,-2.513 -2.6,-0.613 -4.088,-0.613
  Component Side region: 2.6,-2.512 4.088,-2.512 4.088,-0.612 2.6,-0.612
  Component Side keep-out region: 2.59,-0.602 2.06,-0.602 2.06,-2.522 2.59,-2.522
  Component Side keep-out region: -0.24,-2.522 0.24,-2.522 0.24,-0.602 -0.24,-0.602
  Component Side keep-out region: -2.59,-2.522 -2.06,-2.522 -2.06,-0.602 -2.59,-0.602
  Component Side keep-out region: -3.75,-2.887 3.75,-2.887 3.75,-2.523 -3.75,-2.523
  Component Side keep-out region: 1.7,-0.603 3.75,-0.603 3.75,0.413 1.7,0.413
  Component Side keep-out region: -1.7,-0.603 1.7,-0.603 1.7,0.213 -1.7,0.213
  Component Side keep-out region: -3.75,-0.602 -1.7,-0.602 -1.7,0.413 -3.75,0.413
  silkscreen extent -3.75,0.91 3.75,2.59, body extent -4.37,-4.19 4.37,1.86, height 2.83
INF-PG-SOT23_M [mm] "SOT23, 3-Leads, Body 2.9x1.3mm, Pitch 0.95mm, IPC Low Density"
  rect 1.35x0.6 smd: 1(-1.2,0.95) 2(-1.2,-0.95) 3(1.2,0)
  silkscreen extent -1.32,-1.5 0.7,1.93, body extent -0.7,-1.5 0.7,1.5, height 1.1
J1-0603 [mm] "Chip Resistor, Body 1.6x0.8mm, IPC High Density"
  rect 0.7x0.9 smd: 1(-0.75,0) 2(0.75,0)
  silkscreen extent -0.2,-0.35 0.2,0.35, body extent -0.85,-0.48 0.85,0.48, height 0.9
LED_0805 [mm] "Liteon 0805 Chip LED"
  rect 1.25x1.1 smd: 1(-1.175,0) 2(1.175,0)
  silkscreen extent -2.01,-0.8 0.2,0.8, body extent -1,-0.63 1,0.63, height 0.8
MICL-SOICN-8LD-PL-1_V [mm] "SOIC, 8-Leads, Body 5x4mm, Pitch 1.27mm"
  oval 2.2x0.7 smd: 1(-2.75,1.905) 2(-2.75,0.635) 3(-2.75,-0.635) 4(-2.75,-1.905) 5(2.75,-1.905) 6(2.75,-0.635) 7(2.75,0.635) 8(2.75,1.905)
  silkscreen extent -2.88,-2.5 1.25,2.93, body extent -3.01,-2.44 3.01,2.45, height 1.73
"MOLEX NANO-FIT 1X3" [mm]
  round 1.56 hole 1.2: 1(0,0) 2(2.5,0) 3(5,0)
  round 2.1 hole 1.7: ""(0,-7.15) ""(5,-7.15)
  silkscreen extent -1.65,-10.35 6.65,-1.9, body extent -2.6,-26.11 10.97,0.32, height 7.56
"MOLEX NANO-FIT 1X4" [mm]
  round 1.56 hole 1.2: 1(0,0) 2(2.5,0) 3(5,0) 4(7.5,0)
  round 2.1 hole 1.7: ""(0,-7.15) ""(7.5,-7.15)
  silkscreen extent -1.65,-10.35 9.15,-1.9, body extent -2.65,-26.07 10.05,0.22, height 7.56
"MOLEX NANO-FIT 2x4" [mm] "MOLEX NANO-FIT 2X4"
  round 1.56 hole 1.2: 1(0,0) 2(2.5,0) 3(5,0) 4(7.5,0) 5(0,2.5) 6(2.5,2.5) 7(5,2.5) 8(7.5,2.5)
  round 1.7 hole 1.7: ""(0,9.68) ""(7.5,9.68)
  silkscreen extent -1.28,-1.43 8.85,4.77, body extent -2.6,-0.44 10.1,29.85, height 10.71
"MOLEX NANO-FIT 2X6 - Right Angle" [mm]
  round 1.56 hole 1.2: 1(15,2.5) 2(12.5,2.5) 3(10,2.5) 4(7.5,2.5) 5(5,2.5) 6(2.5,2.5) 7(15,0) 8(12.5,0) 9(10,0) 10(7.5,0) 11(5,0) 12(2.5,0)
  round 2.1 hole 1.7: ""(2.5,-7.225) ""(15,-7.225)
  body extent -0.2,-28.97 17.5,2.78, height 9.98
MOLX-502774-0891_V [mm] "SMD, 14-Leads, Body 15x14.3mm, Pitch 1.1mm"
  rect 0.8x1.68 smd: 1(-2.9,7.385) 2(-1.8,7.385) 3(-0.7,7.385) 4(0.4,7.385) 5(1.5,7.385) 6(2.6,7.385) 7(3.7,7.385) 8(4.8,7.385)
  rect 1.29x1.3 smd: 9(6.855,5.825)
  rect 1.29x1.4 smd: 10(6.855,-1.575)
  rect 1.5x1.7 smd: 11(6.75,-7.375) 12(-6.75,-7.375)
  rect 1.7x1.5 smd: 13(-6.45,7.475)
  rect 1.6x1.5 smd: 14(6.21,7.475)
  silkscreen extent -7.15,-7.88 7.15,8.9, body extent -7.15,-8 7.15,8, height 1.78
"Mounting Hole #4-40" [mm] "Mounting Hole for ANSI #4-40 w/ Flat Washer, Loose Fit"
  round 6.1 hole 3.7: 0(0,0)
MURA-BLM31-B-CHIP-2_V [mm] "Chip Ferrite Bead, 2-Leads, Body 3.2x1.6mm, Height 1.3mm"
  rect 1.6x1.2 smd: 1(-1.8,0) 2(1.8,0)
  body extent -1.6,-0.8 1.6,0.8, height 1.3
ONSC-TSOP-5-483-02_V [mm] "SOP, 5-Leads, Body 3x1.5mm, Pitch 0.95mm"
  rect 1x0.7 smd: 1(-1.2,0.95) 2(-1.2,0) 3(-1.2,-0.95) 4(1.2,-0.95) 5(1.2,0.95)
  silkscreen extent -1.33,-1.5 0.3,1.97, body extent -0.75,-1.5 0.75,1.5, height 1.1
OSCSC320X250X100N [mm]
  rect 0.98x1.1 smd: 1(-0.85,1.1) 2(-0.85,-1.1) 3(0.85,-1.1) 4(0.85,1.1)
  silkscreen extent -1.84,1.16 -1.66,1.34, body extent -1.24,-1.6 1.24,1.6, height 0.99
PK0003A_N [mm] "SOT89, 3-Leads, Body 4.6x2.6mm, Pitch 1.5mm, IPC Medium Density"
  rrect14% 1.4x0.7 smd: 1(-1.8,1.5) 3(-1.8,-1.5)
  rrect17% 1.5x0.7 smd: 2(-1.75,0)
  Component Side region: -1,0.35 -0.35,1 2.05,1 2.7,0.35 2.7,-0.35 2.05,-1 -0.35,-1 -1,-0.35 -1.2,-0.35 -1.2,0.35
  silkscreen extent -2.07,-2.3 1.3,2.52, body extent -2.19,-2.3 2.19,2.3, height 1.6
RESC0603(1608)_N [mm] "Chip Resistor, Body 1.6x0.8mm, IPC Medium Density"
  rect 0.9x1 smd: 1(-0.8,0) 2(0.8,0)
  silkscreen extent -0.05,-0.4 0.05,0.4, body extent -0.85,-0.47 0.85,0.47, height 0.6
RESC3216X62X50LL20T20 [mm] "Chip Resistor, 2-Leads, Body 3.40x1.80mm, IPC High Density"
  rect 1.05x1.7 smd: 1(-1.325,0) 2(1.325,0)
  silkscreen extent -0.4,-0.75 0.4,0.75, body extent -1.7,-0.9 1.7,0.9, height 0.62
ROS-51K201-400A5_V [mm] "BNC 50R Right Angle Jack, 12x23.1x14.5mm, Rosenberger Recommended"
  round 1.6 hole 1.05: 1(0,0)
  round 1.9 hole 1.35: MH(-5.05,5.05) MH(-5.05,-5.05) MH(5.05,5.05) MH(5.05,-5.05)
  silkscreen extent -6,-6 6,6, body extent -6,-6 6,17.1, height 14.53
"Solder Jumper - Closed" [mm]
  rect 0.2x1.4 smd paste+0: 1(0,0) 2(0.775,0)
  Component Side region: 0.375,-0.7 0,-0.7 0,0.7 0.375,0.7 0.125,0.45 0.125,-0.45
  Component Side region: 0.35,0.375 0.675,0.7 0.675,-0.7 0.35,-0.375
STM-LQFP100_L [mm] "Thin QFP, 100-Leads, Body 14x14mm, Pitch 0.5mm, IPC High Density"
  oval 1.55x0.25 smd: 1(-7.525,6) 2(-7.525,5.5) 3(-7.525,5) 4(-7.525,4.5) 5(-7.525,4) 6(-7.525,3.5) 7(-7.525,3) 8(-7.525,2.5) 9(-7.525,2) 10(-7.525,1.5) 11(-7.525,1) 12(-7.525,0.5) 13(-7.525,0) 14(-7.525,-0.5) 15(-7.525,-1) 16(-7.525,-1.5) 17(-7.525,-2) 18(-7.525,-2.5) 19(-7.525,-3) 20(-7.525,-3.5) 21(-7.525,-4) 22(-7.525,-4.5) 23(-7.525,-5) 24(-7.525,-5.5) 25(-7.525,-6) 51(7.525,-6) 52(7.525,-5.5) 53(7.525,-5) 54(7.525,-4.5) 55(7.525,-4) 56(7.525,-3.5) 57(7.525,-3) 58(7.525,-2.5) 59(7.525,-2) 60(7.525,-1.5) 61(7.525,-1) 62(7.525,-0.5) 63(7.525,0) 64(7.525,0.5) 65(7.525,1) 66(7.525,1.5) 67(7.525,2) 68(7.525,2.5) 69(7.525,3) 70(7.525,3.5) 71(7.525,4) 72(7.525,4.5) 73(7.525,5) 74(7.525,5.5) 75(7.525,6)
  oval 0.25x1.55 smd: 26(-6,-7.525) 27(-5.5,-7.525) 28(-5,-7.525) 29(-4.5,-7.525) 30(-4,-7.525) 31(-3.5,-7.525) 32(-3,-7.525) 33(-2.5,-7.525) 34(-2,-7.525) 35(-1.5,-7.525) 36(-1,-7.525) 37(-0.5,-7.525) 38(0,-7.525) 39(0.5,-7.525) 40(1,-7.525) 41(1.5,-7.525) 42(2,-7.525) 43(2.5,-7.525) 44(3,-7.525) 45(3.5,-7.525) 46(4,-7.525) 47(4.5,-7.525) 48(5,-7.525) 49(5.5,-7.525) 50(6,-7.525) 76(6,7.525) 77(5.5,7.525) 78(5,7.525) 79(4.5,7.525) 80(4,7.525) 81(3.5,7.525) 82(3,7.525) 83(2.5,7.525) 84(2,7.525) 85(1.5,7.525) 86(1,7.525) 87(0.5,7.525) 88(0,7.525) 89(-0.5,7.525) 90(-1,7.525) 91(-1.5,7.525) 92(-2,7.525) 93(-2.5,7.525) 94(-3,7.525) 95(-3.5,7.525) 96(-4,7.525) 97(-4.5,7.525) 98(-5,7.525) 99(-5.5,7.525) 100(-6,7.525)
  silkscreen extent -7.65,-6.35 6.35,6.8, body extent -7,-7 7,7, height 1.6
"Test Point Loop - Black" [mil] ", black"
  round 80 hole 40: 1(0,0)
  body extent -50,-50 50,50, height 180
"TT BI 22A TRIM POT" [mm] "Model 22A (22AR100KLFTR)"
  rect 1.09x1.6 smd: 1(1.155,0) 3(-1.155,0)
  rect 1.6x1.6 smd: 2(0,2.9)
  body extent -1.6,-0.38 1.6,3.13, height 2.22

## Part data
C1 C5 C9 C13 C41 C44 C50 C52 C57: library part CMP-1035-02733-1, "CAP 1uF 10V ±10% 0603 (1608 Metric) Thickness 1mm SMD", Case-EIA=0603, Case-Metric=1608, Rated Voltage="10 V", Tolerance=±10%, Max Thickness="1 mm", Technology=SMT
C2 C6 C10 C14 C19 C24 C27 C28 C29 C30 C31 C32 C33 C34 C35 C36 C37 C38 C40 C43 C45 C47 C49 C51 C56: library part CMP-1035-02580-1, "CAP 100nF 10V ±10% 0603 (1608 Metric) Thickness 1mm SMD", Case-EIA=0603, Case-Metric=1608, Rated Voltage="10 V", Tolerance=±10%, Max Thickness="1 mm", Technology=SMT
C3 C4 C7 C8 C11 C12 C15 C16: library part CMP-1035-02314-1, "CAP 10nF 25V ±1% 0603 (1608 Metric) Thickness 1mm SMD", Case-EIA=0603, Case-Metric=1608, Rated Voltage="25 V", Tolerance=±1%, Max Thickness="1 mm", Technology=SMT
C17 C18 C22 C23: library part CMP-1035-00549-1, "CAP 10pF 25V ±1% 0603 (1608 Metric) Thickness 1mm SMD", Case-EIA=0603, Case-Metric=1608, Rated Voltage="25 V", Tolerance=±1%, Max Thickness="1 mm", Technology=SMT
C20 C21 C25 C26: library part CMP-1035-02758-1, "CAP 2.2uF 10V ±10% 0603 (1608 Metric) Thickness 1mm SMD", Case-EIA=0603, Case-Metric=1608, Rated Voltage="10 V", Tolerance=±10%, Max Thickness="1 mm", Technology=SMT
C39 C42 C46 C48: library part CMP-1035-02799-1, "CAP 10uF 10V ±10% 0603 (1608 Metric) Thickness 1mm SMD", Case-EIA=0603, Case-Metric=1608, Rated Voltage="10 V", Tolerance=±10%, Max Thickness="1 mm", Technology=SMT
C53: library part CMP-1038-01290-1, "CAP 22nF 16V ±5% 1210 (3225 Metric) Thickness 1mm SMD", Case-EIA=1210, Case-Metric=3225, Rated Voltage="16 V", Tolerance=±20%, Max Thickness="1 mm", Technology=SMT
C54: library part CMP-1035-02315-1, "CAP 10nF 25V ±2% 0603 (1608 Metric) Thickness 1mm SMD", Case-EIA=0603, Case-Metric=1608, Rated Voltage="25 V", Tolerance=±2%, Max Thickness="1 mm", Technology=SMT
C55: library part CMP-1038-02286-1, "CAP 22uF 25V -20% to +80% 1210 (3225 Metric) Thickness 2.2mm SMD", Case-EIA=1210, Case-Metric=3225, Rated Voltage="25 V", Tolerance="-20% to +80%", Max Thickness="2.2 mm", Technology=SMT
CD1 CD2: library part CMP-2000-05248-1, "Micro SD Memory Card Connector, 0.5 A, 10 V (DC), -25 to 85 degC, 8-Pin SMT, RoHS, Tape and Reel", Current Rating=500mA, Manufacturer=Molex, Max Operating Temperature=85°C, Max Voltage Rating (DC)=1.01kV, Min Operating Temperature=-25°C, Package Quantity=1, Supplier Part Number 1=WM24066CT-ND, Voltage Rating (AC)=10V, 3D Model=502774-0891.stp, Card Type=SecureDigital-microSD™, Catalog Drawings=502774-0891, Category=Connectors,Interconnects, ComponentLink1Description=https://datasheet.ciiva.com/15226/getdatasheetpartid-119109-15226226.pdf, ComponentLink1URL=https://datasheet.ciiva.com/15226/getdatasheetpartid-119109-15226226.pdf, ComponentLink2Description=https://datasheet.ciiva.com/16655/5027740891-memory-card-socket-16655603.pdf, ComponentLink2URL=https://datasheet.ciiva.com/16655/5027740891-memory-card-socket-16655603.pdf, ComponentLink3Description=https://datasheet.ciiva.com/11755/0900766b80f752a0-11755064.pdf, ComponentLink3URL=https://datasheet.ciiva.com/11755/0900766b80f752a0-11755064.pdf, ComponentLink4Description=https://datasheet.ciiva.com/683/5027740891-sd-683628.pdf, ComponentLink4URL=https://datasheet.ciiva.com/683/5027740891-sd-683628.pdf, ComponentLink5Description=https://datasheet.ciiva.com/683/5027740891-sd-683629.pdf, ComponentLink5URL=https://datasheet.ciiva.com/683/5027740891-sd-683629.pdf, ComponentLink6Description=https://datasheet.ciiva.com/683/5027740891-sd-683630.pdf, ComponentLink6URL=https://datasheet.ciiva.com/683/5027740891-sd-683630.pdf, ComponentLink7Description=https://datasheet.ciiva.com/1104/ps-502774-001-1104670.pdf, ComponentLink7URL=https://datasheet.ciiva.com/1104/ps-502774-001-1104670.pdf, ComponentLink8Description=https://datasheet.ciiva.com/4581/5027740891-memory-card-socket-179575-4581102.pdf, ComponentLink8URL=https://datasheet.ciiva.com/4581/5027740891-memory-card-socket-179575-4581102.pdf, ComponentLink9Description=https://datasheet.ciiva.com/1104/1499551-1104671.pdf, ComponentLink9URL=https://datasheet.ciiva.com/1104/1499551-1104671.pdf, Connector Type=ConnectorandEjector, Contact Finish=Gold, Contact Finish Thickness=20µin(0.51µm), Contact Material="Copper,Copper Alloy", Contact Plating=Gold, Datasheet URL=https://datasheet.ciiva.com/1104/1499551-1104671.pdf, Datasheet Version="Rev. D, 04/2004", Depth=16mm, Ejector Side=-, Family=MemoryConnectors-PCCardSockets, Features=Switch, Gender=Male, Halogen Free="Low Halogen", Height=1.8mm, Height Above Board="0.071\"(1.80mm)", Housing Material=Polymer, Insertion, Removal Method=PushIn,PushOut, Length=14.6mm, Manufacturer Part Number=502774-0891, Manufacturer URL=http://www.molex.com/, Mount="Surface Mount,Reverse", Mounting Feature=Reverse-Bottom, Mounting Type=SurfaceMount,RightAngle, Number of Circuits=8, Number of Contacts=8, Number of Positions=10(8+2), Number of Rows=1, Online Catalog=microSD™Series, Orientation="Right Angle", Other Names=WM24066DKR, Packaging=Digi-Reel, Pitch=1.1mm, Pricing 1="1=3.31, 10=3.177, 25=2.912, 50=2.7796, 100=2.6473, 250=2.3164, 500=2.2502 (USD)", Radiation Hardening=No, REACH SVHC=Unknown, RoHS Information=502774-0891CertofCompliance, Series=502774, Standard Package=1, Stock 1=7772, Supplier 1=Digi-Key, Termination=Solder, Width=1.8mm
D1 D2: library part LED0, "led", Case/Package=0805, Case Code (Metric)=2012, Colour=Blue, Forward Voltage=2.65V, Lens Colour=Colorless, Manufacturer 1=Kingbright, Manufacturer Part Number 1=APT2012LVBC/D, Supplier Part Number 1=754-1938-1-ND, Test Current=2mA, Case Code (Imperial)=0805, ComponentLink1Description=http://www.mouser.com/ds/2/216/APT2012LVBC-D-535767.pdf, ComponentLink1URL=http://www.mouser.com/ds/2/216/APT2012LVBC-D-535767.pdf, ComponentLink2Description=http://www.kingbrightusa.com/images/catalog/SPEC/APT2012LVBC-D.pdf, ComponentLink2URL=http://www.kingbrightusa.com/images/catalog/SPEC/APT2012LVBC-D.pdf, Dominant Wavelength=470nm, Height=0.75mm, Lead Free="Lead Free", Length=2mm, Lens Transparency=Clear, Luminous Intensity=24mcd, Mount="Surface Mount", Packaging="Tape and Reel", Pricing 1="1=0.69, 10=0.541, 25=0.4508, 100=0.3885, 250=0.3469, 500=0.2983, 1000=0.2303 (USD)", Stock 1=44757, Supplier 1=Digi-Key, Viewing Angle=120°, Width=1.25mm
D3 D4 D5 D7 D9 D10 D11 D12: library part LED0, "led", Color=Green, Current - Test=20mA, Lens Color=Colorless, Manufacturer="Lite-On Inc.", Manufacturer Part Number=LTST-C171KGKT, Millicandela Rating=35mcd, Package / Case="0805 (2012 Metric)", Supplier Part Number 1=160-1426-1-ND, Voltage - Forward (Vf) (Typ)=2V, Category=Optoelectronics, ComponentLink1Description=http://optoelectronics.liteon.com/upload/download/DS22-2000-118/LTST-C171KGKT.pdf, ComponentLink1URL=http://optoelectronics.liteon.com/upload/download/DS22-2000-118/LTST-C171KGKT.pdf, Features=-, Height (Max)=0.90mm, Lens Style/Size="Rectangle with Flat Top, 1.40mm x 1.25mm", Lens Transparency=Clear, Mounting Type="Surface Mount", Packaging="Cut Tape (CT)", Part Status=Active, Pricing 1="1=0.31, 10=0.225, 25=0.1656, 100=0.1183, 250=0.0804, 500=0.07096, 1000=0.05558 (USD)", RoHS="RoHS Compliant", Size / Dimension="2.00mm L x 1.25mm W", Stock 1=350441, Supplier 1=Digi-Key, Viewing Angle=130°, Wavelength - Dominant=571nm, Wavelength - Peak=574nm
D6 D8: library part LED0, "led /  LTST-C171KSKT", Color=Green, Current - Test=20mA, Lens Color=Colorless, Manufacturer="Lite-On Inc.", Manufacturer Part Number=LTST-C171KGKT, Millicandela Rating=35mcd, Package / Case="0805 (2012 Metric)", Supplier Part Number 1=160-1426-1-ND, Voltage - Forward (Vf) (Typ)=2V, Category=Optoelectronics, ComponentLink1Description=http://optoelectronics.liteon.com/upload/download/DS22-2000-110/LTST-C171KSKT.pdf, ComponentLink1URL=http://optoelectronics.liteon.com/upload/download/DS22-2000-110/LTST-C171KSKT.pdf, Features=-, Height (Max)=0.90mm, Lens Style/Size="Rectangle with Flat Top, 1.40mm x 1.25mm", Lens Transparency=Clear, Mounting Type="Surface Mount", Packaging="Cut Tape (CT)", Part Status=Active, Pricing 1="1=0.31, 10=0.225, 25=0.1656, 100=0.1183, 250=0.0804, 500=0.07096, 1000=0.05558 (USD)", RoHS="RoHS Compliant", Size / Dimension="2.00mm L x 1.25mm W", Stock 1=350441, Supplier 1=Digi-Key, Viewing Angle=130°, Wavelength - Dominant=571nm, Wavelength - Peak=574nm
D13 D14 D15 D16 D17: library part LED0, "led", Color=Red, Current - Test=20mA, Lens Color=Colorless, Manufacturer="Lite-On Inc.", Manufacturer Part Number=LTST-C171KRKT, Millicandela Rating=54mcd, Package / Case="0805 (2012 Metric)", Supplier Part Number 1=160-1427-1-ND, Voltage - Forward (Vf) (Typ)=2V, Category=Optoelectronics, ComponentLink1Description=http://optoelectronics.liteon.com/upload/download/DS22-2000-109/LTST-C171KRKT.pdf, ComponentLink1URL=http://optoelectronics.liteon.com/upload/download/DS22-2000-109/LTST-C171KRKT.pdf, Features=-, Height (Max)=0.80mm, Lens Style/Size="Rectangle with Flat Top, 1.40mm x 1.25mm", Lens Transparency=Clear, Mounting Type="Surface Mount", Packaging="Cut Tape (CT)", Part Status=Active, Pricing 1="1=0.31, 10=0.225, 25=0.1656, 100=0.1183, 250=0.0804, 500=0.07096, 1000=0.05558 (USD)", RoHS="RoHS Compliant", Size / Dimension="2.00mm L x 1.25mm W", Stock 1=260544, Supplier 1=Digi-Key, Viewing Angle=130°, Wavelength - Dominant=631nm, Wavelength - Peak=639nm
FB1: library part CMP-0686-00744-2, "Chip Ferrite Bead for Power Lines, 600 Ohm, 1500 mA, -55 to 125 degC, 3.2 x 1.6 x 1.3 mm SMD, Tape and Reel", DC Resistance="0.08 Ohm Max.", Manufacturer=Murata, Operating Temperature Range="-55 to 125 degC", Rated Current="1500 mA", ComponentLink1Description="Manufacturer URL", ComponentLink1URL=http://www.murata.com/, ComponentLink2Description=Datasheet, ComponentLink2URL=http://www.murata.com/products/catalog/pdf/c31e.pdf, ComponentLink3Description="Package Specification", ComponentLink3URL=http://www.murata.com/products/catalog/pdf/c31e.pdf, DatasheetVersion=08/2013, Impedance (at 100 MHz)="600 Ohm +/- 25%", Mounting Technology="Surface Mount", PackageDescription="2-Pin Chip, Body 3.2 x 1.6 mm", PackageReference=BLM31-2, Packing="Tape and Reel", PartNumber=BLM31PG601SN1L
J1 J2 J3 J4: library part CMP-0753-00003-1, "BNC 50R Right Angle Jack, Up to 10 GHz, -55 to 155 degC", Manufacturer=Rosenberger, ComponentLink1Description="Manufacturer URL", ComponentLink1URL=http://www.rosenberger.de, ComponentLink2Description=Datasheet, ComponentLink2URL=http://rosenberger.de/ok/images/documents/db/51K201-400A5.pdf, ComponentLink3Description="Package Specification", ComponentLink3URL=http://rosenberger.de/ok/images/documents/db/51K201-400A5.pdf, ComponentLink4Description="Series Overview / Design Note", ComponentLink4URL=http://rosenberger.de/ok/images/documents/spez/51.pdf, ComponentLink5Description="Webshop / RFQ", ComponentLink5URL=http://www.rosenberger.com/en/contact/sales/, DatasheetVersion=a00, Design Note="Footprint in library is a generic example - only application specific footprint delivers High Performance", Mounting Technology="Through Hole", PackageDescription="50R BNC Right Angle Jack, 12 x 23.1 x 14.5 mm", PackageReference=51K201-400A5, PackageVersion=a00, PartNumber=51K201-400A5
J5 J6: library part "jtag 10pos mini", Supplier Part Number 1=1175-1629-ND, Supplier 1=Digi-Key
J7 J8: library part CMP-1349-00001-2, "USB 2.0 Standard Micro-USB Connector, Micro AB-Standard (Bottom Mount), 30 V AC, -30 to 85 degC, Right Angle, 5-Pin 7.5 x 5.6 x 2.8 mm SMD, RoHS, Reel", Capacitance="2 pF Max.", Contact Resistance="30 mOhm Max.", Manufacturer="Hirose Electric", Operating Temperature Range="-30 to 85 degC", Voltage Rating="30 V AC", ComponentLink1Description="Manufacturer URL", ComponentLink1URL=http://www.hirose.com/, ComponentLink2Description=Datasheet, ComponentLink2URL=http://www.hirose.co.jp/cataloge_hp/ed_ZX_20140804.pdf, ComponentLink3Description="Package Specification", ComponentLink3URL=http://www.hirose.co.jp/cataloge_hp/ed_ZX_20140804.pdf, DatasheetVersion=Aug-14, Mounting Technology="Surface Mount", Number of Contacts=5, PackageDescription="USB Micro-AB Connector, Right Angle, Body 7.5 x 5.6 mm, Pitch 0.65 mm, Height 2.8 mm", Packing=Reel, PartNumber=ZX62D-AB-5P8, RoHS=TRUE
J9: library part "Jumper Closed", "Jumper"
MH1 MH2 MH3 MH4: library part "Mounting Hole #4-40, Loose Fit", "Mounting Hole for ANSI #4-40 w/ Flat Washer, Loose Fit", Datasheet=http://blogs.mentor.com/tom-hausherr/blog/tag/pcb-mounting-holes/
P1: library part "8-Pin 2-Row Nano-Fit", "NanoFit RA Hdr TH DR 8Ckt", Manufacturer=Molex, Part Number=105314-1216, Supplier Part Number=WM15165-ND, Supplier Part Number 1=WM15168-ND, Supplier=Digi-Key, Supplier 1=Digi-Key
P2 P7: library part "12-Pin 2-Row Nano-Fit", "NanoFit RA Hdr TH DR 12Ckt", Supplier Part Number 1=WM15170-ND, ComponentLink1Description="Digikey Link", ComponentLink1URL=https://www.digikey.com/product-detail/en/molex-llc/1053141312/WM15170-ND/6164259, Supplier 1=Digi-Key
P3: library part "3-Pin Nano-Fit", "NanoFit RA Hdr TH SR 3Ckt", Manufacturer=Molex, Part Number=105313-1204, Supplier Part Number=538-105313-1204, Supplier=Mouser
P4 P5: library part "4-Pin Nano-Fit", "NanoFit RA Hdr TH SR 4Ckt", Manufacturer=Molex, Part Number=105313-1204, Supplier Part Number=538-105313-1204, Supplier=Mouser
P6: "Header, 2-Pin, Dual row", LatestRevisionDate=17-Jul-2002, LatestRevisionNote="Re-released for DXP Platform.", Publisher="Altium Limited"
Q1 Q2: library part CMP-1149-00026-1, "N-Channel OptiMOS Small-Signal-Transistor, 60 V VDS, 0.3 A ID, -55 to 150 degC, PG-SOT23, Reel, Green", Manufacturer=Infineon, ComponentLink1Description="Manufacturer URL", ComponentLink1URL=http://www.infineon.com/, ComponentLink2Description=Datasheet, ComponentLink2URL=http://www.infineon.com/dgdl/2N7002_Rev2.4.pdf?folderId=db3a3043156fd573011622e10b5c1f67&fileId=db3a304319bc939a0119c2a9461e79e6, ComponentLink3Description="Package Specification", ComponentLink3URL=http://www.infineon.com/dgdl/SOT23-Package_Overview.pdf?folderId=db3a30431936bc4b0119532290053c66&fileId=db3a30431936bc4b0119533468123c85, DatasheetVersion="Rev. 2.4", Green=TRUE, Halogen-free=TRUE, ID (max)="0.3 A", IDpuls (max)="1.2 A", Mounting Technology="Surface Mount", PackageDescription="3-Pin Small Outline Transistor Package, 2.9 x 1.3 mm Body, 0.95 mm Pitch", PackageReference=PG-SOT23, PackageVersion=Apr-08, Packing=Reel, PartNumber=2N7002, Ptot (max)="0.5 W", QG="0.4 nC", RDS (on) (max)="3,000 mOhm", RDS (on) (max) (@4.5V)="4,000 mOhm", RthJA (max)="250 K/W", VDS (max)="60 V", VGS(th) (max)="2.5 V", VGS(th) (min)="1.5 V"
Q3: library part CMP-2000-06250-1, "N-Channel Logic Level Enhancement Mode Field Effect Transistor,2.2 A, 30 V, -55 to 150 degC, 3-Pin SOT-23, RoHS, Tape and Reel", Continuous Drain Current Id=2.5A, Current Id Max=2.2A, Current Temperature=25°C, Drain Source Voltage Vds=20V, Manufacturer="Fairchild Semiconductor", On Resistance Rds(on)=52mohm, Operating Temperature Max=150°C, Operating Temperature Min=-55°C, Operating Temperature Range=-55°Cto+150°C, Package / Case=SOT-23, Package Description="3-Pin Small Outline Transistor, Body 2.92 x 1.4 mm, Pitch 0.95 mm", Package Reference=SSOT3L, Package Version="Rev. 3, 05/2015", Power Dissipation Pd=500mW, Pulse Current Idm=10A, Rds(on) Test Voltage Vgs=4.5V, Threshold Voltage Vgs Typ=700mV, Voltage Vds Typ=30V, Datasheet URL=https://www.fairchildsemi.com/datasheets/FD/FDN337N.pdf, Datasheet Version="Rev. C, 03/1998", External Depth=2.5mm, External Length / Height=1.12mm, External Width=3.05mm, Full Power Rating Temperature=25°C, Id=2.2A, Manufacturer URL=https://www.fairchildsemi.com/, Mounting Technology=SurfaceMount, No. of Pins=3, No. of Transistors=1, Package URL=https://www.fairchildsemi.com/package-drawings/MA/MA03B.pdf, RDS(on)=0.082Ohm, Reel Quantity=3000, SMD Marking=337, SVHC=NoSVHC(19-Dec-2012), Tape Width=8mm, Termination Type=SMD, Transistor Case Style=SOT-23, Transistor Polarity=NChannel, Trr=10ns, Vdss=30V, Vgss=+/-8V, Voltage Vgs Max=700mV, Voltage Vgs Rds on Measurement=4.5V, Vth=0.7V
R1 R8 R15 R22: library part CMP-1012-00542-1, "2K 0.1W 1% 0603 (1608 Metric)  SMD", Case-EIA=0603, Case-Metric=1608, Power="0.1 W", Tolerance="1 %", Technology=SMT
R2 R6 R9 R13 R16 R20 R23 R27: library part CMP-1012-00566-1, "3K24 0.1W 1% 0603 (1608 Metric)  SMD", Case-EIA=0603, Case-Metric=1608, Power="0.1 W", Tolerance="1 %", Technology=SMT
R3 R10 R17 R24 R76 R77 R78 R79: library part CMP-1012-00444-1, "270R 0.1W 1% 0603 (1608 Metric)  SMD", Case-EIA=0603, Case-Metric=1608, Power="0.1 W", Tolerance="1 %", Technology=SMT
R4 R5 R7 R11 R12 R14 R18 R19 R21 R25 R26 R28: library part CMP-1012-00623-1, "10K 0.1W 1% 0603 (1608 Metric)  SMD", Case-EIA=0603, Case-Metric=1608, Power="0.1 W", Tolerance="1 %", Technology=SMT
R29 R30: library part CMP-1012-00409-1, "130R 0.1W 1% 0603 (1608 Metric)  SMD", Case-EIA=0603, Case-Metric=1608, Power="0.1 W", Tolerance="1 %", Technology=SMT
R31 R32 R34 R36 R37 R39 R43 R46 R48 R51 R70: library part CMP-1012-00050-1, "100R 0.1W 5% 0603 (1608 Metric)  SMD", Case-EIA=0603, Case-Metric=1608, Power="0.1 W", Tolerance="5 %", Technology=SMT
R33 R35: library part CMP-1012-00058-1, "220R 0.1W 5% 0603 (1608 Metric)  SMD", Case-EIA=0603, Case-Metric=1608, Power="0.1 W", Tolerance="5 %", Technology=SMT
R38: library part CMP-1012-00518-1, "1K2 0.1W 1% 0603 (1608 Metric)  SMD", Case-EIA=0603, Case-Metric=1608, Power="0.1 W", Tolerance="1 %", Technology=SMT
R40: library part CMP-1012-00473-1, "470R 0.1W 1% 0603 (1608 Metric)  SMD", Case-EIA=0603, Case-Metric=1608, Power="0.1 W", Tolerance="1 %", Technology=SMT
R41 R42 R44 R45 R47 R49 R50 R59 R65 R75: library part CMP-1012-00098-1, "10K 0.1W 5% 0603 (1608 Metric)  SMD", Case-EIA=0603, Case-Metric=1608, Power="0.1 W", Tolerance="5 %", Technology=SMT
R52 R53: library part CMP-1012-00360-1, "47R 0.1W 1% 0603 (1608 Metric)  SMD", Case-EIA=0603, Case-Metric=1608, Power="0.1 W", Tolerance="1 %", Technology=SMT
R54 R55 R56 R57 R58 R60 R61 R62 R63 R64: library part CMP-1012-00699-1, "47K 0.1W 1% 0603 (1608 Metric)  SMD", Case-EIA=0603, Case-Metric=1608, Power="0.1 W", Tolerance="1 %", Technology=SMT
R66: library part CMP-1678-00004-1, "Chip Resistor, 0.05 Ohm, +/- 1%, 1 W, -55 to 155 degC, 1206 (3216 Metric), RoHS, Tape and Reel", Capacitance="2E-11 f", Frequency="12 MHz", Frequency Tolerance=30ppm, Load Capacitance="20 pF", Max Operating Temperature="70 degC", Min Operating Temperature="-20 degC", Package Quantity=100, Resistance="60 Ohm", Tolerance=50ppm, ComponentLink1Description="Manufacturer URL", ComponentLink1URL=http://www.ohmite.com/, ComponentLink2Description=Datasheet, ComponentLink2URL=http://www.ohmite.com/cat/res_mcs.pdf, DatasheetVersion=Nov-16, ESR="60 Ohm", Height="3.6 mm", Length="11.35 mm", Mount="Through Hole", PackageDescription="2-Pin Surface Mount Device, Body 3.2 x 1.6 mm", PackageReference=1206, Packaging=Bulk, Pins=2, Radiation Hardening=No, REACH SVHC="No SVHC", RoHSCompliant=true, Width="4.65 mm"
R67 R74: library part "TT 22AR Trim Pot", "TT Electronics BI 22AR100KLFTR SMT trim pot, 100k 20%", Supplier Part Number 1=987-1003-1-ND, Tolerance=20%, Datasheet=http://www.bitechnologies.com/pdfs/22.pdf, Supplier 1=Digi-Key
R68: library part CMP-1012-00510-1, "1K 0.1W 1% 0603 (1608 Metric)  SMD", Case-EIA=0603, Case-Metric=1608, Power="0.1 W", Tolerance="1 %", Technology=SMT
R69: library part CMP-1012-00454-1, "330R 0.1W 1% 0603 (1608 Metric)  SMD", Case-EIA=0603, Case-Metric=1608, Power="0.1 W", Tolerance="1 %", Technology=SMT
R71: library part CMP-1012-00680-1, "33K 0.1W 1% 0603 (1608 Metric)  SMD", Case-EIA=0603, Case-Metric=1608, Power="0.1 W", Tolerance="1 %", Technology=SMT
R72 R73: "Resistor", LatestRevisionDate=29-May-2009, LatestRevisionNote="IPC-7351 Footprint Added.", PackageDescription="Chip Resistor", PackageReference=J1-0603, Published=8-Jun-2000, Publisher="Altium Limited"
S1 S2: library part "EVP-AA Switch", "EVP-AA Momentary Switch SPST-NO", Part Number=EVP-AA202K, Supplier Part Number 1=P13348SCT-ND, Datasheet=http://industrial.panasonic.com/lecs/www-data/pdf/ATK0000/ATK0000CE26.pdf, Supplier 1=Digi-Key
TP1 TP2 TP3 TP4: "Keyston Electronics 5001 Test Point Loop", Color=Black, Manufacturer="Keystone Electronics", Manufacturer P/N=5001, Supplier Part Number 1=36-5001-ND, Supplier 1=Digi-Key
U1 U2 U3 U4: library part CMP-0055-01331-3, "Tiny Low Power Operational Amplifier with Rail-to-Rail Input and Output, 5-pin SOT-23", Manufacturer="Texas Instruments", Package Reference=DBV0005A, PackageTopMarking=A00A*XTT, PowerWise=N, ComponentLink1Description="Datasheet URL", ComponentLink1URL=http://www.ti.com/general/docs/lit/getliterature.tsp?genericPartNumber=LMC7101&fileType=pdf, CompType=Amplifiers, PackageDescription="Molded SOT-23, .115 x .063 x .040 in Body, 5 Lead, .0375 in Pitch", PinCount=5, RoHS=N
U5 U6: library part CMP-1572-00044-1, "ARM Cortex-M4 32-bit MCU+FPU, 1024 KB Flash, 320 KB Internal RAM, 82 I/Os, 100-Pin LQFP, -40 to 105 degC, Tray", I/Os (High Current)=82, Operating Frequency(F) (Processor speed) (MHz)=216, Package Description="100-Pin Low Profile Quad Flat Package, Body 14 x 14 mm, Pitch 0.5 mm", Package Reference=LQFP100, Supply Voltage(Vcc) min (V)=1.7, ComponentLink1Description="Manufacturer URL", ComponentLink1URL=http://www.st.com/, ComponentLink2Description=Datasheet, ComponentLink2URL=http://www.st.com/st-web-ui/static/active/en/resource/technical/document/datasheet/DM00166116.pdf, Core="ARM Cortex-M7", D/A Converter=2, DatasheetVersion="Rev. 2", FLASH Size (Prog) (kB)=1024, Internal RAM Size (kB)=320, Mounting Technology="Surface Mount", Packing=Tray
U7: library part CMP-0324-00006-3, "Regulator with 11.5 to 24 V Input and 9 V Output, 0 to 125 degC, 3-Pin SOT-89 (PK), Green (RoHS & no Sb/Br)", Code_JEDEC=TO-243, DatasheetVersion=SLVS010S, Eco-Plan="Green (RoHS & no Sb/Br)", Iout(Max)(A)=0.1, Iq(Typ)(mA)=6, Mounting Technology="Through Hole", PackageDescription="3-Pin Plastic Small Outline, Body 2.5 x 4.5 mm, Pitch 1.5 mm", PackageReference=PK0003A, PackageVersion="4040234/D, 02/2006", PartNumber=UA78L09ACPK, SubFamily="Standard Voltage Regulator", Vin(Max)(V)=24, Vin(Min)(V)=11.5, Vout(Max)(V)=9, Vout(Min)(V)=9
U8: library part CMP-1558-00003-1, "High-Speed High-Side MOSFET Driver, 12 to 36 V, -40 to 85 degC, 8-Pin SOIC, RoHS, Tube", Temperature Max="85 degC", Temperature Min="-40 degC", ComponentLink1Description="Manufacturer URL", ComponentLink1URL=http://www.micrel.com/, ComponentLink2Description=Datasheet, ComponentLink2URL=http://www.micrel.com/_PDF/mic5021.pdf, ComponentLink3Description="Package Specification", ComponentLink3URL=http://www.micrel.com/_Packages/SOICN-8LD-PL-1.pdf, Mounting Technology="Surface Mount", PackageDescription="8-Pin Small Outline Integrated Package, Body 4.89 x 3.90 mm, Pitch 1.27 mm", PackageVersion="Rev. A", Packing=Tube, PartNumber=MIC5021YM, RoHS=TRUE, VDD Max="36 V", VDD Min="12 V"
U9: library part CMP-1305-00060-1, "Low Power Single Voltage Comparator, 2 to 36 V, -40 to 125 degC, 5-Pin TSOP, Pb-Free, Tape and Reel", Manufacturer="On Semiconductor", ComponentLink1Description="Manufacturer URL", ComponentLink1URL=http://www.onsemi.com/, ComponentLink2Description=Datasheet, ComponentLink2URL=http://www.onsemi.com/pub_link/Collateral/TS391-D.PDF, ComponentLink3Description="Package Specification", ComponentLink3URL=http://www.onsemi.com/pub_link/Collateral/483.PDF, DatasheetVersion="Rev. 3", ICC Typ (mA)=0.5, IO Typ (mA)=16, Mounting Technology="Surface Mount", PackageDescription="5-Pin Small Outline Package, Body 3 x 1.5 mm, Pitch 0.95 mm", PackageReference=TSOP-5-483-02, PackageVersion="Rev. K, 04/2013", Packing="Tape and Reel", PartNumber=TS391SN2T1G, RoHS=TRUE, VCC Max (V)=36, VCC Min (V)=2